# EAGLE board production (EAGLE 6.1), part 1 of 2
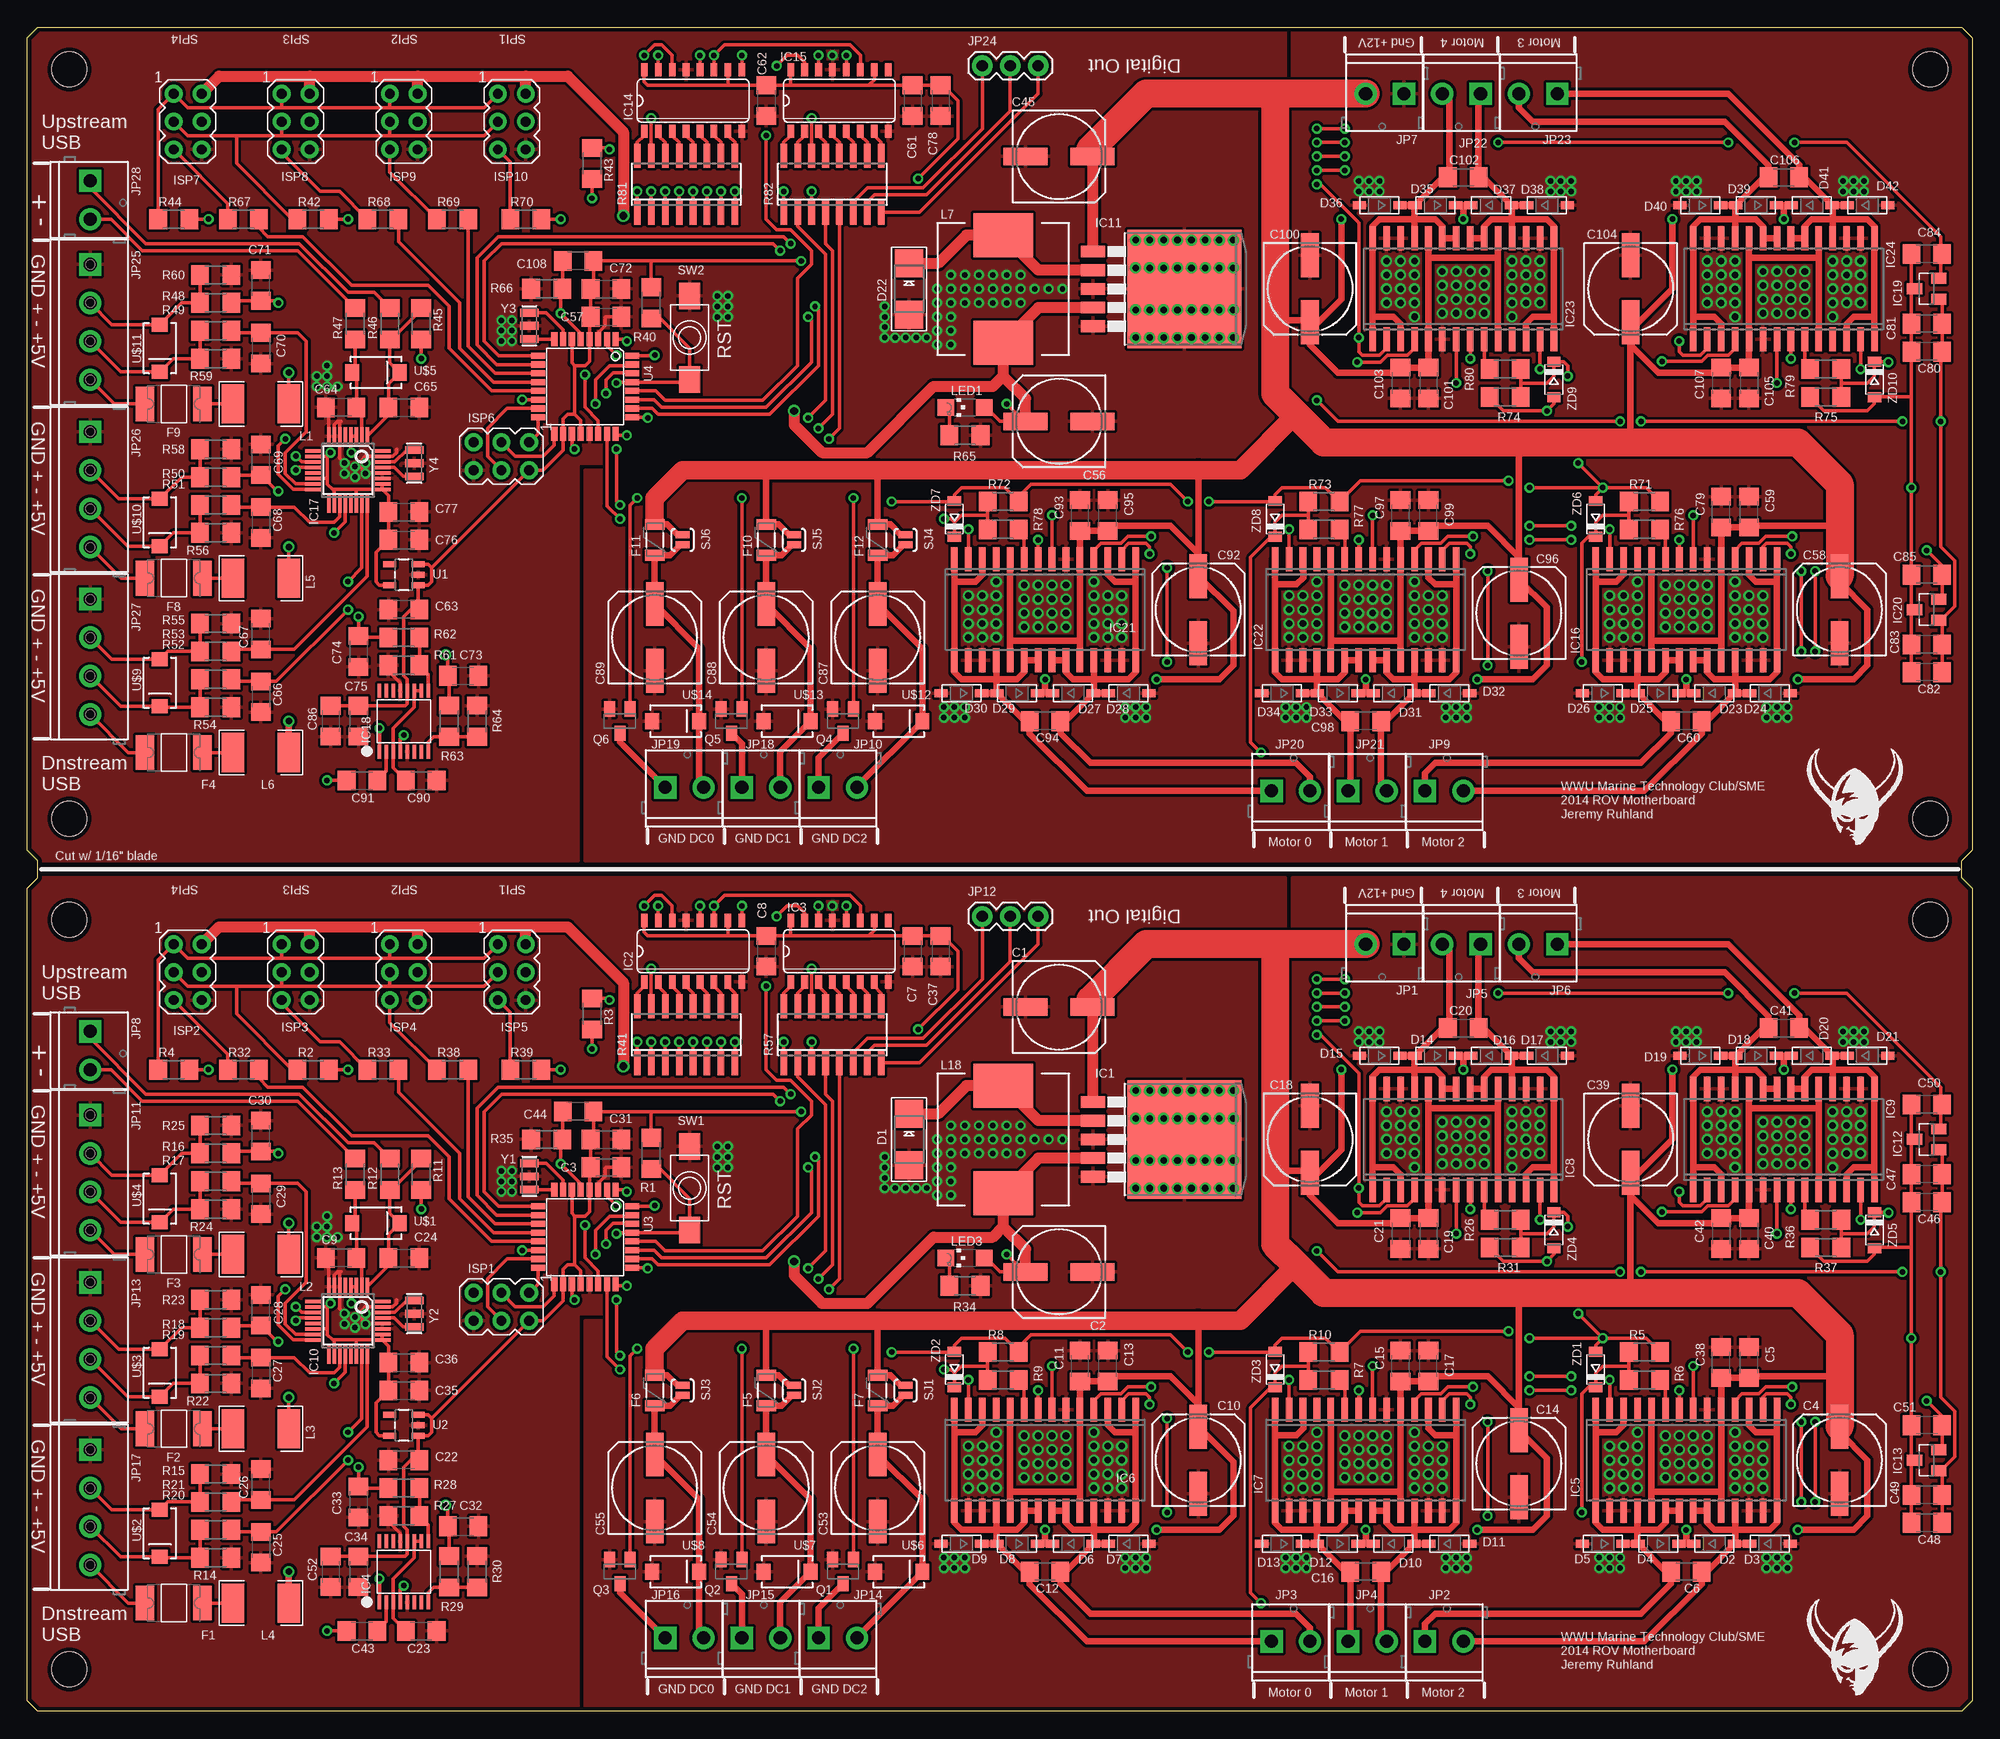
[diagram p0: board, top side]
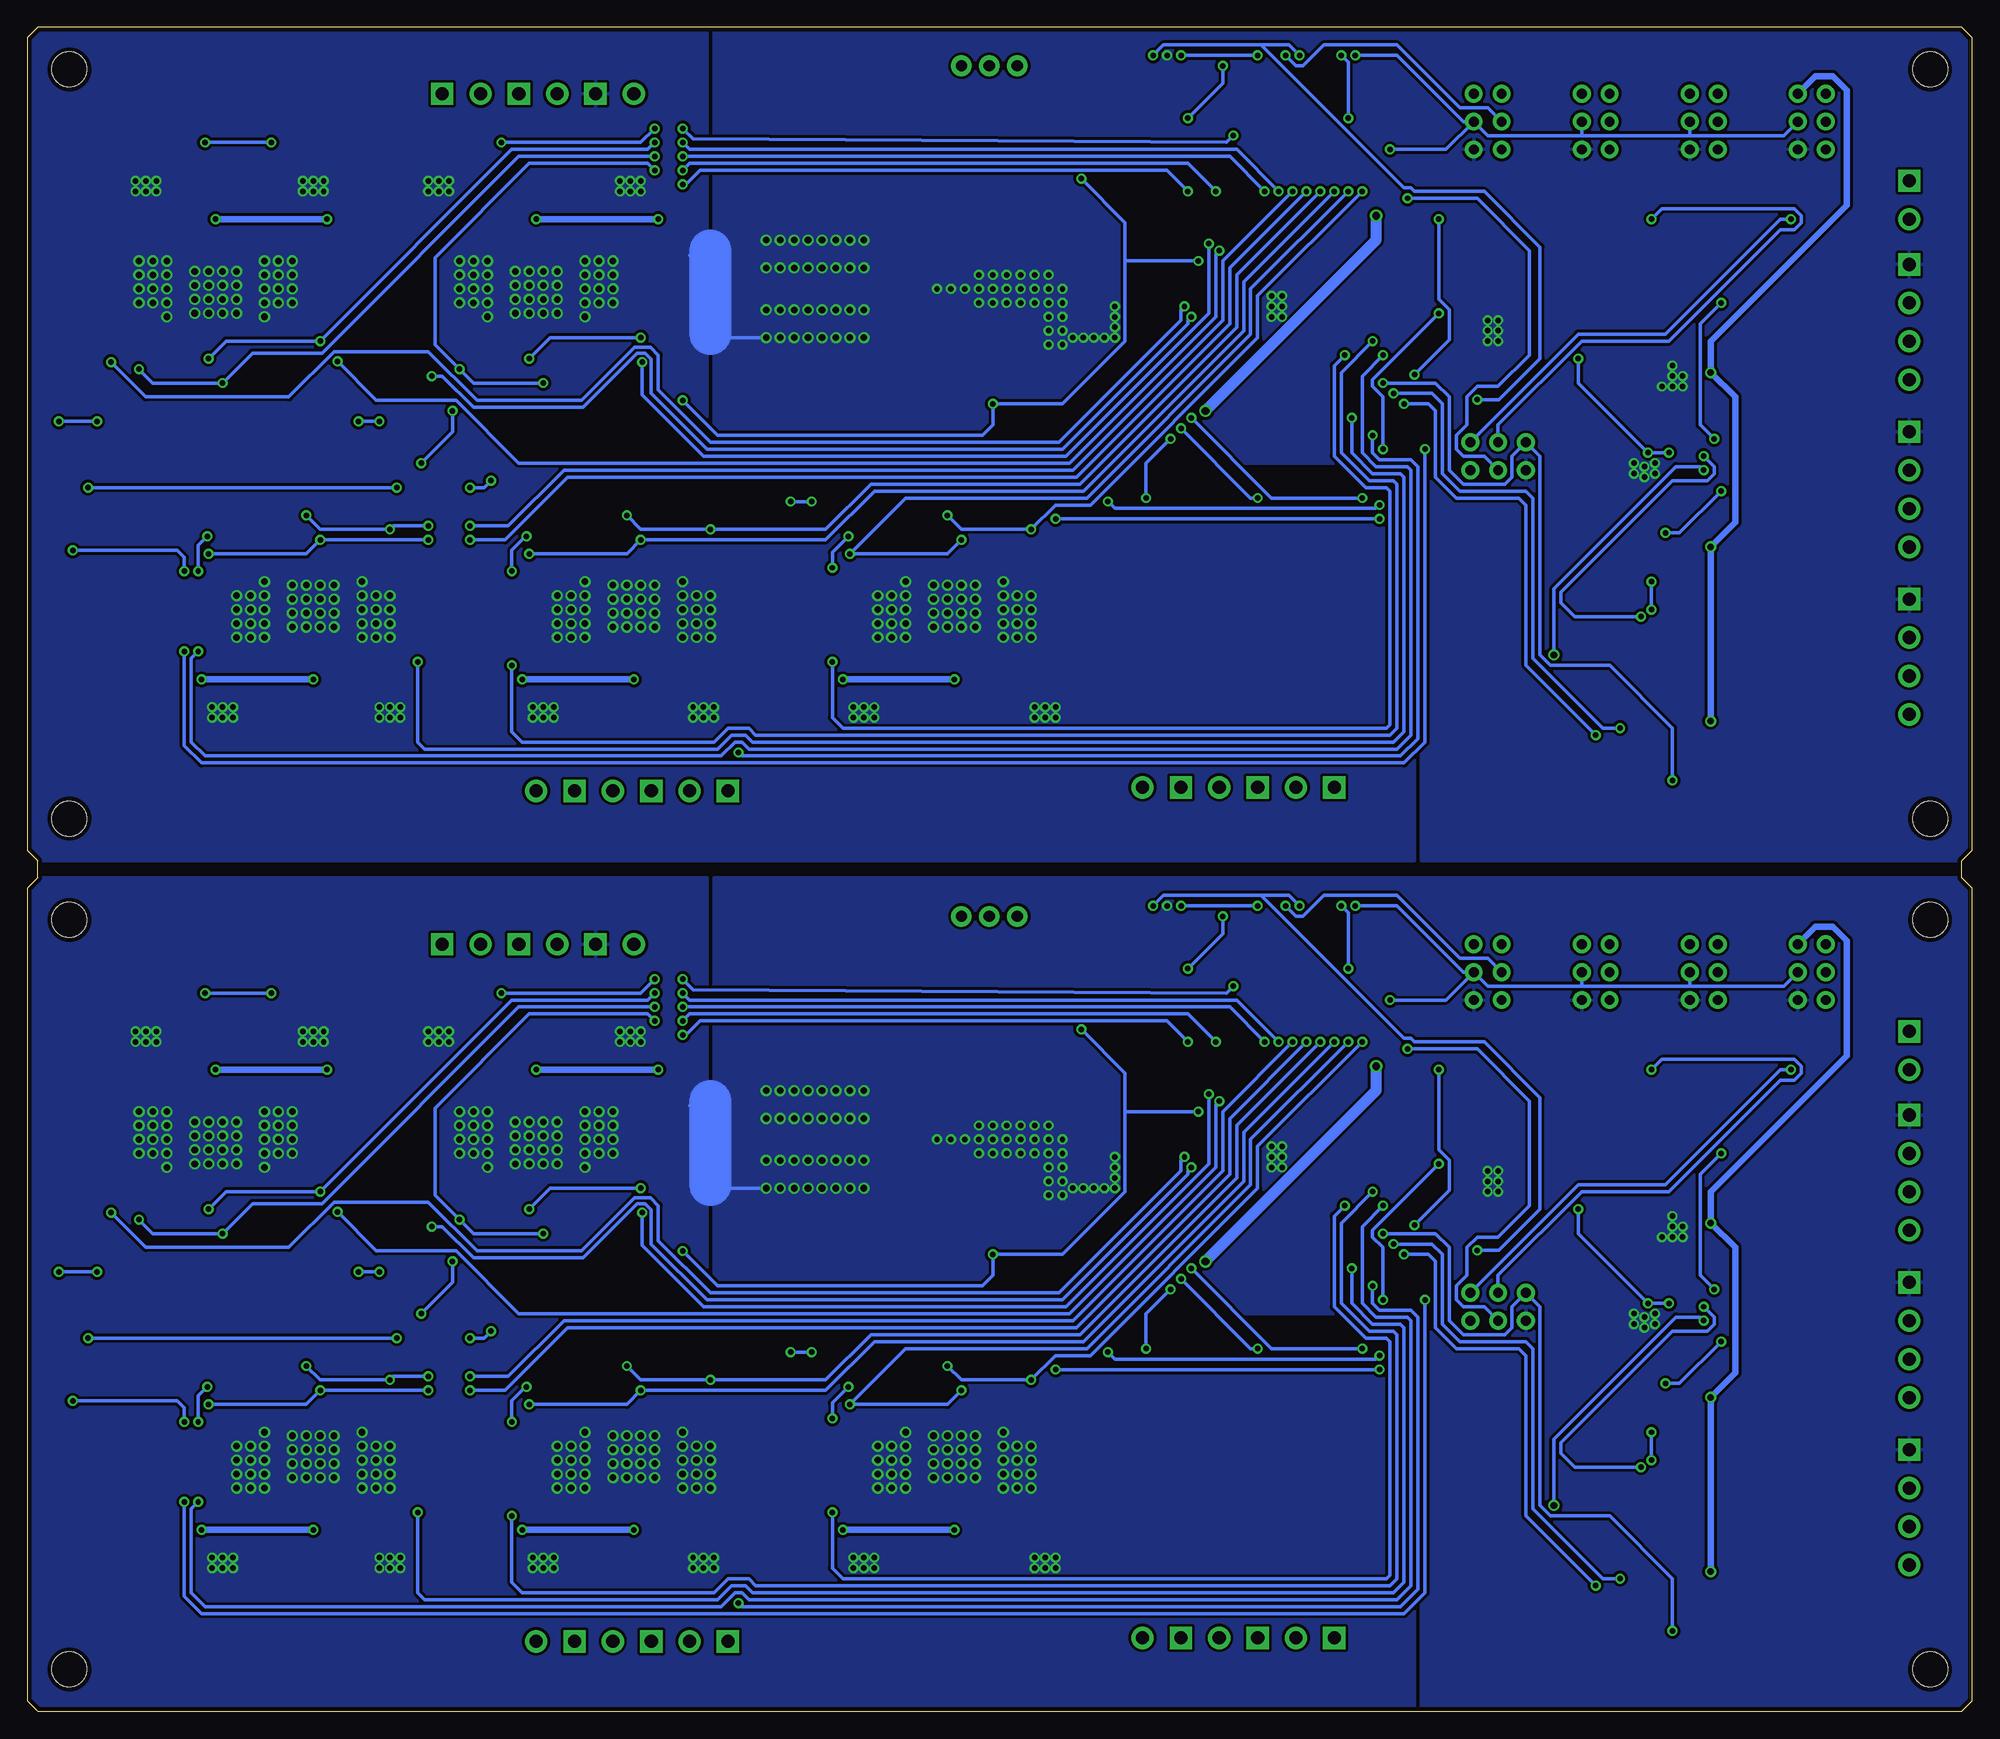
[diagram p1: board, bottom side, seen from below]

Size 177.16 x 153.35 mm. Coordinates in mm from the lower left corner, seen from the top.
Outline: 0,0.95 0,74.93 0.95,75.88 0.95,77.47 0,78.42 0,152.4 0.95,153.35 176.21,153.35 177.16,152.4 177.16,78.42 176.21,77.47 176.21,75.88 177.16,74.93 177.16,0.95 176.21,0 0.95,0 0,0.95
Copper layers (1*16): Top 0.035559375mm / dielectric 1.501140625mm / Bottom 0.035559375mm
Design rules: minimum track width 10mil, minimum drill 15mil, track to track 6mil, track to pad 6mil, pad to pad 6mil, via to via 6mil, smd to smd 6mil, copper to edge 15mil, drill to drill 8mil, minimum pad ring 10mil, minimum via ring 8mil, stop-mask expansion 4mil, vias tented up to drill 0mil, thermal gap 10mil
Holes 3.2 mm at 3.81,3.81 173.35,3.81 3.81,72.07 173.35,72.07 3.81,81.28 173.35,81.28 3.81,149.54 173.35,149.54

## Footprints (pad centres in the part's own frame; a part is rotated, then mirrored left to right if it is on the bottom)
153CLV-0807 = smd 4 x 1.6: + 3.05,0; - -3.05,0
C1206 = smd 1.6 x 1.8: 1 -1.4,0; 2 1.4,0
SMADIODE = smd 2.54 x 2.54: A 2.349,0; C -2.349,0
SOD-123 = smd 1.2 x 0.7: A 1.85,0; C -1.85,0
PTC1812L = smd 1.7 x 3.15: 1 -2.62,0; 2 2.62,0
PTC-1206 = smd 1 x 1.8: 1 -1.4,0; 2 1.4,0
TO263-5 = smd 1.067 x 2.159: 1 -3.404,-5.791; 2 -1.702,-5.791; 3 0,-5.791; 4 1.702,-5.791; 5 3.404,-5.791 | smd 10.8 x 10.41: 6 0,2.54
SO16 = smd 0.6 x 1.2: 1 -4.445,-2.8; 2 -3.175,-2.8; 3 -1.905,-2.8; 4 -0.635,-2.8; 5 0.635,-2.8; 6 1.905,-2.8; 7 3.175,-2.8; 8 4.445,-2.8; 9 4.445,2.8; 10 3.175,2.8; 11 1.905,2.8; 12 0.635,2.8; 13 -0.635,2.8; 14 -1.905,2.8; 15 -3.175,2.8; 16 -4.445,2.8
SSOP-16-FTDI = smd 0.32 x 1.26: 1 -2.223,-2.779; 2 -1.588,-2.779; 3 -0.953,-2.779; 4 -0.318,-2.779; 5 0.317,-2.779; 6 0.952,-2.779; 7 1.587,-2.779; 8 2.222,-2.779; 9 2.222,2.779; 10 1.587,2.779; 11 0.952,2.779; 12 0.317,2.779; 13 -0.318,2.779; 14 -0.953,2.779; 15 -1.588,2.779; 16 -2.223,2.779
SO-28 = smd 0.6 x 2.2: 1 -8.255,-4.6; 2 -6.985,-4.6; 3 -5.715,-4.6; 4 -4.445,-4.6; 5 -3.175,-4.6; 6 -1.905,-4.6; 7 -0.635,-4.6; 8 0.635,-4.6; 9 1.905,-4.6; 10 3.175,-4.6; 11 4.445,-4.6; 12 5.715,-4.6; 13 6.985,-4.6; 14 8.255,-4.6; 15 8.255,4.6; 16 6.985,4.6; 17 5.715,4.6; 18 4.445,4.6; 19 3.175,4.6; 20 1.905,4.6; 21 0.635,4.6; 22 -0.635,4.6; 23 -1.905,4.6; 24 -3.175,4.6; 25 -4.445,4.6; 26 -5.715,4.6; 27 -6.985,4.6; 28 -8.255,4.6
LQFP-32 = smd 0.3 x 1.6: 1 -1.75,-3.1; 2 -1.25,-3.1; 3 -0.75,-3.1; 4 -0.25,-3.1; 5 0.25,-3.1; 6 0.75,-3.1; 7 1.25,-3.1; 8 1.75,-3.1; 17 1.75,3.1; 18 1.25,3.1; 19 0.75,3.1; 20 0.25,3.1; 21 -0.25,3.1; 22 -0.75,3.1; 23 -1.25,3.1; 24 -1.75,3.1 | smd 1.6 x 0.3: 9 3.1,-1.75; 10 3.1,-1.25; 11 3.1,-0.75; 12 3.1,-0.25; 13 3.1,0.25; 14 3.1,0.75; 15 3.1,1.25; 16 3.1,1.75; 25 -3.1,1.75; 26 -3.1,1.25; 27 -3.1,0.75; 28 -3.1,0.25; 29 -3.1,-0.25; 30 -3.1,-0.75; 31 -3.1,-1.25; 32 -3.1,-1.75
SOT23 = smd 1 x 1.4: 1 -0.95,-1.1; 2 0.95,-1.1; 3 0,1.1
AVRISP = drill 0.9 pad 1.626: 1 -1.27,2.54; 2 1.27,2.54; 3 -1.27,0; 4 1.27,0; 5 -1.27,-2.54; 6 1.27,-2.54
SCREWTERMINAL-3.5MM-2 = drill 1.2 pad 2.032 square: 1 0,0 | drill 1.2 pad 2.032: 2 3.5,0
SCREWTERMINAL-3.5MM-4 = drill 1.2 pad 2.032 square: 1 0,0 | drill 1.2 pad 2.032: 2 3.5,0; 3 7,0; 4 10.5,0
1X03 = drill 1.016 pad 1.88: 1 0,0; 2 2.54,0; 3 5.08,0
INDUCTOR-1206 = smd 2.032 x 3.556: P$1 -2.54,0; P$2 2.54,0
CDRH125 = smd 5.4 x 4: 1 0,4.9; 2 0,-4.9
CHIPLED_1206 = smd 1.5 x 1.5: A 0,-1.75; C 0,1.75
R1206 = smd 1.6 x 1.803: 1 -1.422,0; 2 1.422,0
SO16' = smd 0.6 x 2.2: 1 -4.445,-2.6; 2 -3.175,-2.6; 3 -1.905,-2.6; 4 -0.635,-2.6; 5 0.635,-2.6; 6 1.905,-2.6; 7 3.175,-2.6; 8 4.445,-2.6; 9 4.445,2.6; 10 3.175,2.6; 11 1.905,2.6; 12 0.635,2.6; 13 -0.635,2.6; 14 -1.905,2.6; 15 -3.175,2.6; 16 -4.445,2.6
SJ_2S-NO = smd 0.635 x 1.27: 1 -0.45,0; 2 0.45,0
FSMSM = smd 2.413 x 1.905: A -3.81,0; B 3.81,0
SOT23-5 = smd 0.55 x 1.2: 1 -0.95,-1.3; 2 0,-1.3; 3 0.95,-1.3; 4 0.95,1.3; 5 -0.95,1.3
TQFP32-08 = smd 1.27 x 0.559: 1 -4.293,2.8; 2 -4.293,2; 3 -4.293,1.2; 4 -4.293,0.4; 5 -4.293,-0.4; 6 -4.293,-1.2; 7 -4.293,-2; 8 -4.293,-2.8; 17 4.293,-2.8; 18 4.293,-2; 19 4.293,-1.2; 20 4.293,-0.4; 21 4.293,0.4; 22 4.293,1.2; 23 4.293,2; 24 4.293,2.8 | smd 0.559 x 1.27: 9 -2.8,-4.293; 10 -2,-4.293; 11 -1.2,-4.293; 12 -0.4,-4.293; 13 0.4,-4.293; 14 1.2,-4.293; 15 2,-4.293; 16 2.8,-4.293; 25 2.8,4.293; 26 2,4.293; 27 1.2,4.293; 28 0.4,4.293; 29 -0.4,4.293; 30 -1.2,4.293; 31 -2,4.293; 32 -2.8,4.293
SMA-DIODE = smd 1.27 x 1.47: A -2.15,0; C 2.15,0
RESONATOR-SMD = smd 0.7 x 1.7: 1 -1.2,0; 2 0,0; 3 1.2,0
SOD-123' = smd 0.91 x 1.22: A 1.635,0; C -1.635,0

## Placement (x,y rotation side)
C1  1000uF  [153CLV-0807]  93.98,64.14 0 top
C2  1000uF  [153CLV-0807]  93.98,40.01 180 top
C3  0.1uF  [C1206]  52.7,49.53 0 top
C4  500uF  [153CLV-0807]  165.1,22.86 90 top
C5  0.1uF  [C1206]  156.84,31.75 90 top
C6  1uF  [C1206]  151.13,12.7 180 top
C7  0.1uF  [C1206]  80.64,69.22 270 top
C8  0.1uF  [C1206]  67.31,69.22 270 top
C9  47pF  [C1206]  28.57,41.27 180 top
C10  500uF  [153CLV-0807]  106.68,22.86 90 top
C11  0.1uF  [C1206]  95.89,31.43 90 top
C12  1uF  [C1206]  92.71,12.7 180 top
C13  4.7uF  [C1206]  98.42,31.43 90 top
C14  500uF  [153CLV-0807]  135.89,22.54 90 top
C15  0.1uF  [C1206]  125.09,31.43 90 top
C16  1uF  [C1206]  121.92,12.7 180 top
C17  4.7uF  [C1206]  127.64,31.43 90 top
C18  500uF  [153CLV-0807]  116.84,52.07 270 top
C19  0.1uF  [C1206]  127.64,43.5 270 top
C20  1uF  [C1206]  130.81,62.23 0 top
C21  4.7uF  [C1206]  125.09,43.5 270 top
C22  4.7uF  [C1206]  34.29,22.86 180 top
C23  0.1uF  [C1206]  35.88,7.3 0 top
C24  47pF  [C1206]  34.29,41.27 0 top
C25  47pF  [C1206]  21.27,14.92 270 top
C26  47pF  [C1206]  21.27,20.64 90 top
C27  47pF  [C1206]  21.27,30.8 270 top
C28  47pF  [C1206]  21.27,36.51 90 top
C29  47pF  [C1206]  21.27,46.67 270 top
C30  47pF  [C1206]  21.27,52.39 90 top
C31  4.7uF  [C1206]  52.7,52.07 0 top
C32  47pF  [C1206]  39.69,16.83 0 top
C33  47pF  [C1206]  30.16,19.05 270 top
C34  0.1uF  [C1206]  30.16,12.7 270 top
C35  4.7uF  [C1206]  34.29,29.21 0 top
C36  0.1uF  [C1206]  34.29,31.75 0 top
C37  4.7uF  [C1206]  83.19,69.22 270 top
C38  4.7uF  [C1206]  154.31,31.75 90 top
C39  500uF  [153CLV-0807]  146.05,52.07 270 top
C40  0.1uF  [C1206]  156.84,43.5 270 top
C41  1uF  [C1206]  160.02,62.23 0 top
C42  4.7uF  [C1206]  154.31,43.5 270 top
C43  0.1uF  [C1206]  30.48,7.3 0 top
C44  0.1uF  [C1206]  50.16,54.61 180 top
C45  1000uF  [153CLV-0807]  93.98,141.6 0 top
C46  4.7uF  [C1206]  173.04,46.35 180 top
C47  0.1uF  [C1206]  173.04,48.9 180 top
C48  4.7uF  [C1206]  173.04,17.14 180 top
C49  0.1uF  [C1206]  173.04,19.68 180 top
C50  0.1uF  [C1206]  173.04,55.24 180 top
C51  0.1uF  [C1206]  173.04,26.04 180 top
C52  4.7uF  [C1206]  27.62,12.7 270 top
C53  1000uF  [153CLV-0807]  77.47,20.32 90 top
C54  1000uF  [153CLV-0807]  67.31,20.32 90 top
C55  1000uF  [153CLV-0807]  57.15,20.32 90 top
C56  1000uF  [153CLV-0807]  93.98,117.47 180 top
C57  0.1uF  [C1206]  52.7,127 0 top
C58  500uF  [153CLV-0807]  165.1,100.33 90 top
C59  0.1uF  [C1206]  156.84,109.22 90 top
C60  1uF  [C1206]  151.13,90.17 180 top
C61  0.1uF  [C1206]  80.64,146.69 270 top
C62  0.1uF  [C1206]  67.31,146.69 270 top
C63  4.7uF  [C1206]  34.29,100.33 180 top
C64  47pF  [C1206]  28.57,118.75 180 top
C65  47pF  [C1206]  34.29,118.75 0 top
C66  47pF  [C1206]  21.27,92.39 270 top
C67  47pF  [C1206]  21.27,98.11 90 top
C68  47pF  [C1206]  21.27,108.27 270 top
C69  47pF  [C1206]  21.27,113.98 90 top
C70  47pF  [C1206]  21.27,124.14 270 top
C71  47pF  [C1206]  21.27,129.86 90 top
C72  4.7uF  [C1206]  52.7,129.54 0 top
C73  47pF  [C1206]  39.69,94.3 0 top
C74  47pF  [C1206]  30.16,96.52 270 top
C75  0.1uF  [C1206]  30.16,90.17 270 top
C76  4.7uF  [C1206]  34.29,106.68 0 top
C77  0.1uF  [C1206]  34.29,109.22 0 top
C78  4.7uF  [C1206]  83.19,146.69 270 top
C79  4.7uF  [C1206]  154.31,109.22 90 top
C80  4.7uF  [C1206]  173.04,123.83 180 top
C81  0.1uF  [C1206]  173.04,126.36 180 top
C82  4.7uF  [C1206]  173.04,94.61 180 top
C83  0.1uF  [C1206]  173.04,97.16 180 top
C84  0.1uF  [C1206]  173.04,132.72 180 top
C85  0.1uF  [C1206]  173.04,103.5 180 top
C86  4.7uF  [C1206]  27.62,90.17 270 top
C87  1000uF  [153CLV-0807]  77.47,97.79 90 top
C88  1000uF  [153CLV-0807]  67.31,97.79 90 top
C89  1000uF  [153CLV-0807]  57.15,97.79 90 top
C90  0.1uF  [C1206]  35.88,84.77 0 top
C91  0.1uF  [C1206]  30.48,84.77 0 top
C92  500uF  [153CLV-0807]  106.68,100.33 90 top
C93  0.1uF  [C1206]  95.89,108.9 90 top
C94  1uF  [C1206]  92.71,90.17 180 top
C95  4.7uF  [C1206]  98.42,108.9 90 top
C96  500uF  [153CLV-0807]  135.89,100.01 90 top
C97  0.1uF  [C1206]  125.09,108.9 90 top
C98  1uF  [C1206]  121.92,90.17 180 top
C99  4.7uF  [C1206]  127.64,108.9 90 top
C100  500uF  [153CLV-0807]  116.84,129.54 270 top
C101  0.1uF  [C1206]  127.64,120.97 270 top
C102  1uF  [C1206]  130.81,139.7 0 top
C103  4.7uF  [C1206]  125.09,120.97 270 top
C104  500uF  [153CLV-0807]  146.05,129.54 270 top
C105  0.1uF  [C1206]  156.84,120.97 270 top
C106  1uF  [C1206]  160.02,139.7 0 top
C107  4.7uF  [C1206]  154.31,120.97 270 top
C108  0.1uF  [C1206]  50.16,132.08 180 top
D1  [SMADIODE]  80.33,52.07 270 top
D2  [SOD-123]  153.67,15.24 0 top
D3  [SOD-123]  158.75,15.24 0 top
D4  [SOD-123]  148.59,15.24 180 top
D5  [SOD-123]  143.51,15.24 180 top
D6  [SOD-123]  95.25,15.24 0 top
D7  [SOD-123]  100.33,15.24 0 top
D8  [SOD-123]  90.17,15.24 180 top
D9  [SOD-123]  85.09,15.24 180 top
D10  [SOD-123]  124.46,15.24 0 top
D11  [SOD-123]  129.54,15.24 0 top
D12  [SOD-123]  119.38,15.24 180 top
D13  [SOD-123]  114.3,15.24 180 top
D14  [SOD-123]  128.27,59.69 180 top
D15  [SOD-123]  123.19,59.69 180 top
D16  [SOD-123]  133.35,59.69 0 top
D17  [SOD-123]  138.43,59.69 0 top
D18  [SOD-123]  157.48,59.69 180 top
D19  [SOD-123]  152.4,59.69 180 top
D20  [SOD-123]  162.56,59.69 0 top
D21  [SOD-123]  167.64,59.69 0 top
D22  [SMADIODE]  80.33,129.54 270 top
D23  [SOD-123]  153.67,92.71 0 top
D24  [SOD-123]  158.75,92.71 0 top
D25  [SOD-123]  148.59,92.71 180 top
D26  [SOD-123]  143.51,92.71 180 top
D27  [SOD-123]  95.25,92.71 0 top
D28  [SOD-123]  100.33,92.71 0 top
D29  [SOD-123]  90.17,92.71 180 top
D30  [SOD-123]  85.09,92.71 180 top
D31  [SOD-123]  124.46,92.71 0 top
D32  [SOD-123]  129.54,92.71 0 top
D33  [SOD-123]  119.38,92.71 180 top
D34  [SOD-123]  114.3,92.71 180 top
D35  [SOD-123]  128.27,137.16 180 top
D36  [SOD-123]  123.19,137.16 180 top
D37  [SOD-123]  133.35,137.16 0 top
D38  [SOD-123]  138.43,137.16 0 top
D39  [SOD-123]  157.48,137.16 180 top
D40  [SOD-123]  152.4,137.16 180 top
D41  [SOD-123]  162.56,137.16 0 top
D42  [SOD-123]  167.64,137.16 0 top
F1  500mA  [PTC1812L]  13.34,9.84 180 top
F2  500mA  [PTC1812L]  13.34,25.72 180 top
F3  500mA  [PTC1812L]  13.34,41.59 180 top
F4  500mA  [PTC1812L]  13.34,87.31 180 top
F5  PTCSMD  [PTC-1206]  67.31,29.21 90 top
F6  PTCSMD  [PTC-1206]  57.15,29.21 90 top
F7  PTCSMD  [PTC-1206]  77.47,29.21 90 top
F8  500mA  [PTC1812L]  13.34,103.19 180 top
F9  500mA  [PTC1812L]  13.34,119.06 180 top
F10  PTCSMD  [PTC-1206]  67.31,106.68 90 top
F11  PTCSMD  [PTC-1206]  57.15,106.68 90 top
F12  PTCSMD  [PTC-1206]  77.47,106.68 90 top
IC1  LM2576  [TO263-5]  102.87,52.07 270 top
IC2  74LS595D  [SO16]  60.64,69.22 0 top
IC3  74LS595D  [SO16]  73.98,69.22 0 top
IC4  IC_FT230X-SSOP-16  [SSOP-16-FTDI]  34.29,12.7 0 top
IC5  VN5772AK  [SO-28]  151.13,22.86 180 top
IC6  VN5772AK  [SO-28]  92.71,22.86 180 top
IC7  VN5772AK  [SO-28]  121.92,22.86 180 top
IC8  VN5772AK  [SO-28]  130.81,52.07 0 top
IC9  VN5772AK  [SO-28]  160.02,52.07 0 top
IC10  TUSB2046B  [LQFP-32]  29.21,35.56 180 top
IC11  LM2576  [TO263-5]  102.87,129.54 270 top
IC12  LM50  [SOT23]  173.04,52.07 90 top
IC13  LM50  [SOT23]  173.04,22.86 90 top
IC14  74LS595D  [SO16]  60.64,146.69 0 top
IC15  74LS595D  [SO16]  73.98,146.69 0 top
IC16  VN5772AK  [SO-28]  151.13,100.33 180 top
IC17  TUSB2046B  [LQFP-32]  29.21,113.03 180 top
IC18  IC_FT230X-SSOP-16  [SSOP-16-FTDI]  34.29,90.17 0 top
IC19  LM50  [SOT23]  173.04,129.54 90 top
IC20  LM50  [SOT23]  173.04,100.33 90 top
IC21  VN5772AK  [SO-28]  92.71,100.33 180 top
IC22  VN5772AK  [SO-28]  121.92,100.33 180 top
IC23  VN5772AK  [SO-28]  130.81,129.54 0 top
IC24  VN5772AK  [SO-28]  160.02,129.54 0 top
ISP1  AVRISP-6  [AVRISP]  43.18,36.83 270 top
ISP2  AVRISP-6  [AVRISP]  14.61,67.31 0 top
ISP3  AVRISP-6  [AVRISP]  24.45,67.31 0 top
ISP4  AVRISP-6  [AVRISP]  34.29,67.31 0 top
ISP5  AVRISP-6  [AVRISP]  44.13,67.31 0 top
ISP6  AVRISP-6  [AVRISP]  43.18,114.3 270 top
ISP7  AVRISP-6  [AVRISP]  14.61,144.78 0 top
ISP8  AVRISP-6  [AVRISP]  24.45,144.78 0 top
ISP9  AVRISP-6  [AVRISP]  34.29,144.78 0 top
ISP10  AVRISP-6  [AVRISP]  44.13,144.78 0 top
JP1  [SCREWTERMINAL-3.5MM-2]  125.41,69.85 180 top
JP2  [SCREWTERMINAL-3.5MM-2]  127.32,6.35 0 top
JP3  [SCREWTERMINAL-3.5MM-2]  113.35,6.35 0 top
JP4  [SCREWTERMINAL-3.5MM-2]  120.33,6.35 0 top
JP5  [SCREWTERMINAL-3.5MM-2]  132.4,69.85 180 top
JP6  [SCREWTERMINAL-3.5MM-2]  139.38,69.85 180 top
JP7  [SCREWTERMINAL-3.5MM-2]  125.41,147.32 180 top
JP8  [SCREWTERMINAL-3.5MM-2]  5.71,61.91 270 top
JP9  [SCREWTERMINAL-3.5MM-2]  127.32,83.82 0 top
JP10  [SCREWTERMINAL-3.5MM-2]  72.07,84.14 0 top
JP11  [SCREWTERMINAL-3.5MM-4]  5.71,54.29 270 top
JP12  [1X03]  87,72.39 0 top
JP13  [SCREWTERMINAL-3.5MM-4]  5.71,39.05 270 top
JP14  [SCREWTERMINAL-3.5MM-2]  72.07,6.67 0 top
JP15  [SCREWTERMINAL-3.5MM-2]  65.09,6.67 0 top
JP16  [SCREWTERMINAL-3.5MM-2]  58.1,6.67 0 top
JP17  [SCREWTERMINAL-3.5MM-4]  5.71,23.81 270 top
JP18  [SCREWTERMINAL-3.5MM-2]  65.09,84.14 0 top
JP19  [SCREWTERMINAL-3.5MM-2]  58.1,84.14 0 top
JP20  [SCREWTERMINAL-3.5MM-2]  113.35,83.82 0 top
JP21  [SCREWTERMINAL-3.5MM-2]  120.33,83.82 0 top
JP22  [SCREWTERMINAL-3.5MM-2]  132.4,147.32 180 top
JP23  [SCREWTERMINAL-3.5MM-2]  139.38,147.32 180 top
JP24  [1X03]  87,149.86 0 top
JP25  [SCREWTERMINAL-3.5MM-4]  5.71,131.76 270 top
JP26  [SCREWTERMINAL-3.5MM-4]  5.71,116.52 270 top
JP27  [SCREWTERMINAL-3.5MM-4]  5.71,101.28 270 top
JP28  [SCREWTERMINAL-3.5MM-2]  5.71,139.38 270 top
L1  [INDUCTOR-1206]  21.27,119.06 180 top
L2  [INDUCTOR-1206]  21.27,41.59 180 top
L3  [INDUCTOR-1206]  21.27,25.72 180 top
L4  [INDUCTOR-1206]  21.27,9.84 180 top
L5  [INDUCTOR-1206]  21.27,103.19 180 top
L6  [INDUCTOR-1206]  21.27,87.31 180 top
L7  100uH  [CDRH125]  88.9,129.54 0 top
L18  100uH  [CDRH125]  88.9,52.07 0 top
LED1  [CHIPLED_1206]  85.41,118.75 90 top
LED3  [CHIPLED_1206]  85.41,41.27 90 top
Q1  [SOT23]  74.3,12.7 180 top
Q2  [SOT23]  64.14,12.7 180 top
Q3  [SOT23]  53.98,12.7 180 top
Q4  [SOT23]  74.3,90.17 180 top
Q5  [SOT23]  64.14,90.17 180 top
Q6  [SOT23]  53.98,90.17 180 top
R1  10k  [R1206]  56.83,50.8 90 top
R2  10k  [R1206]  26.04,58.42 0 top
R3  10k  [R1206]  51.44,63.5 270 top
R4  10k  [R1206]  13.34,58.42 0 top
R5  2k  [R1206]  147.32,32.7 0 top
R6  70  [R1206]  147.32,30.16 0 top
R7  70  [R1206]  118.11,30.16 0 top
R8  2k  [R1206]  88.9,32.7 0 top
R9  70  [R1206]  88.9,30.16 0 top
R10  2k  [R1206]  118.11,32.7 0 top
R11  1.5k  [R1206]  35.88,48.9 270 top
R12  27  [R1206]  33.02,48.9 90 top
R13  27  [R1206]  29.84,48.9 90 top
R14  15k  [R1206]  17.14,13.97 0 top
R15  15k  [R1206]  17.14,21.59 0 top
R16  27  [R1206]  17.14,50.8 0 top
R17  27  [R1206]  17.14,48.26 0 top
R18  27  [R1206]  17.14,34.92 0 top
R19  27  [R1206]  17.14,32.38 0 top
R20  27  [R1206]  17.14,16.51 0 top
R21  27  [R1206]  17.14,19.05 0 top
R22  15k  [R1206]  17.14,29.84 0 top
R23  15k  [R1206]  17.14,37.47 0 top
R24  15k  [R1206]  17.14,45.72 0 top
R25  15k  [R1206]  17.14,53.34 0 top
R26  70  [R1206]  134.62,44.77 180 top
R27  15k  [R1206]  34.29,17.78 0 top
R28  27  [R1206]  34.29,20.32 0 top
R29  27  [R1206]  38.42,12.7 270 top
R30  15k  [R1206]  40.96,12.7 270 top
R31  2k  [R1206]  134.62,42.23 180 top
R32  10k  [R1206]  19.68,58.42 0 top
R33  10k  [R1206]  32.38,58.42 0 top
R34  500  [R1206]  85.41,38.73 0 top
R35  0  [R1206]  47.31,52.07 180 top
R36  70  [R1206]  163.83,44.77 180 top
R37  2k  [R1206]  163.83,42.23 180 top
R38  10k  [R1206]  38.73,58.42 0 top
R39  10k  [R1206]  45.4,58.42 0 top
R40  10k  [R1206]  56.83,128.27 90 top
R41  10k  [SO16']  60.01,61.59 0 top
R42  10k  [R1206]  26.04,135.89 0 top
R43  10k  [R1206]  51.44,140.97 270 top
R44  10k  [R1206]  13.34,135.89 0 top
R45  1.5k  [R1206]  35.88,126.36 270 top
R46  27  [R1206]  33.02,126.36 90 top
R47  27  [R1206]  29.84,126.36 90 top
R48  27  [R1206]  17.14,128.27 0 top
R49  27  [R1206]  17.14,125.73 0 top
R50  27  [R1206]  17.14,112.39 0 top
R51  27  [R1206]  17.14,109.86 0 top
R52  27  [R1206]  17.14,93.98 0 top
R53  27  [R1206]  17.14,96.52 0 top
R54  15k  [R1206]  17.14,91.44 0 top
R55  15k  [R1206]  17.14,99.06 0 top
R56  15k  [R1206]  17.14,107.31 0 top
R57  10k  [SO16']  73.34,61.59 0 top
R58  15k  [R1206]  17.14,114.94 0 top
R59  15k  [R1206]  17.14,123.19 0 top
R60  15k  [R1206]  17.14,130.81 0 top
R61  15k  [R1206]  34.29,95.25 0 top
R62  27  [R1206]  34.29,97.79 0 top
R63  27  [R1206]  38.42,90.17 270 top
R64  15k  [R1206]  40.96,90.17 270 top
R65  500  [R1206]  85.41,116.2 0 top
R66  0  [R1206]  47.31,129.54 180 top
R67  10k  [R1206]  19.68,135.89 0 top
R68  10k  [R1206]  32.38,135.89 0 top
R69  10k  [R1206]  38.73,135.89 0 top
R70  10k  [R1206]  45.4,135.89 0 top
R71  2k  [R1206]  147.32,110.17 0 top
R72  2k  [R1206]  88.9,110.17 0 top
R73  2k  [R1206]  118.11,110.17 0 top
R74  2k  [R1206]  134.62,119.7 180 top
R75  2k  [R1206]  163.83,119.7 180 top
R76  70  [R1206]  147.32,107.63 0 top
R77  70  [R1206]  118.11,107.63 0 top
R78  70  [R1206]  88.9,107.63 0 top
R79  70  [R1206]  163.83,122.24 180 top
R80  70  [R1206]  134.62,122.24 180 top
R81  10k  [SO16']  60.01,139.06 0 top
R82  10k  [SO16']  73.34,139.06 0 top
SJ1  JMP  [SJ_2S-NO]  80.01,29.21 90 top
SJ2  JMP  [SJ_2S-NO]  69.85,29.21 90 top
SJ3  JMP  [SJ_2S-NO]  59.69,29.21 90 top
SJ4  JMP  [SJ_2S-NO]  80.01,106.68 90 top
SJ5  JMP  [SJ_2S-NO]  69.85,106.68 90 top
SJ6  JMP  [SJ_2S-NO]  59.69,106.68 90 top
SW1  [FSMSM]  60.33,47.62 270 top
SW2  [FSMSM]  60.33,125.09 270 top
U1  NCP4625  [SOT23-5]  34.29,103.5 90 top
U2  NCP4625  [SOT23-5]  34.29,26.04 90 top
U3  ATMEGA168  [TQFP32-08]  50.8,43.18 270 top
U4  ATMEGA168  [TQFP32-08]  50.8,120.65 270 top
U$1  TVS  [SMA-DIODE]  31.75,44.45 0 top
U$2  TVS  [SMA-DIODE]  12.06,16.19 270 top
U$3  TVS  [SMA-DIODE]  12.06,30.8 270 top
U$4  TVS  [SMA-DIODE]  12.06,46.67 270 top
U$5  TVS  [SMA-DIODE]  31.75,121.92 0 top
U$6  TVS  [SMA-DIODE]  79.38,12.7 0 top
U$7  TVS  [SMA-DIODE]  69.22,12.7 0 top
U$8  TVS  [SMA-DIODE]  59.05,12.7 0 top
U$9  TVS  [SMA-DIODE]  12.06,93.66 270 top
U$10  TVS  [SMA-DIODE]  12.06,108.27 270 top
U$11  TVS  [SMA-DIODE]  12.06,124.14 270 top
U$12  TVS  [SMA-DIODE]  79.38,90.17 0 top
U$13  TVS  [SMA-DIODE]  69.22,90.17 0 top
U$14  TVS  [SMA-DIODE]  59.05,90.17 0 top
Y1  16Mhz  [RESONATOR-SMD]  45.72,48.7 270 top
Y2  6MHz  [RESONATOR-SMD]  35.24,36.2 90 top
Y3  16Mhz  [RESONATOR-SMD]  45.72,126.17 270 top
Y4  6MHz  [RESONATOR-SMD]  35.24,113.67 90 top
ZD1  5V  [SOD-123']  142.88,31.11 90 top
ZD2  5V  [SOD-123']  84.45,31.11 90 top
ZD3  5V  [SOD-123']  113.67,31.11 90 top
ZD4  5V  [SOD-123']  139.06,43.81 270 top
ZD5  5V  [SOD-123']  168.28,43.81 270 top
ZD6  5V  [SOD-123']  142.88,108.58 90 top
ZD7  5V  [SOD-123']  84.45,108.58 90 top
ZD8  5V  [SOD-123']  113.67,108.58 90 top
ZD9  5V  [SOD-123']  139.06,121.28 270 top
ZD10  5V  [SOD-123']  168.28,121.28 270 top

## Library data of the parts
C1-C108 D1-D42 ISP1-ISP10 LED1 LED3 Q1-Q6 R1-R40 R42-R56 R58-R80 = adafruit
F1-F4 F8 F9 IC4 IC18 ZD1-ZD10 = dp_devices
F5-F7 F10-F12 IC2 IC3 IC14 IC15 JP1-JP28 L1-L7 L18 SJ1-SJ6 U1-U4 U$1-U$14 Y1-Y4 = sparkfun
IC1 IC11-IC13 IC19 IC20 = linear
IC5-IC10 IC16 IC17 IC21-IC24 = rov_club
R41 R57 R81 R82 = resistor-bourns; OC_FARNELL: unknown; OC_NEWARK: unknown
SW1 SW2 = alcoswitch

## Nets
0HA: IC6.2 IC6.8 R41.2
0HA1: IC21.2 IC21.8 R81.2
0HB: IC6.7 IC6.13 R41.1
0HB1: IC21.7 IC21.13 R81.1
0SENSE: R8.1 R9.1 U3.23 ZD2.C
0SENSE1: R72.1 R78.1 U4.23 ZD7.C
0STAT: IC6.4 U3.32
0STAT1: IC21.4 U4.32
1HA: IC7.2 IC7.8 R41.3
1HA1: IC22.2 IC22.8 R81.3
1HB: IC7.7 IC7.13 R41.4
1HB1: IC22.7 IC22.13 R81.4
1SENSE: R7.1 R10.1 U3.24 ZD3.C
1SENSE1: R73.1 R77.1 U4.24 ZD8.C
1STAT: IC7.4 U3.1
1STAT1: IC22.4 U4.1
2HA: IC5.2 IC5.8 R41.5
2HA1: IC16.2 IC16.8 R81.5
2HB: IC5.7 IC5.13 R41.6
2HB1: IC16.7 IC16.13 R81.6
2SENSE: R5.1 R6.1 U3.25 ZD1.C
2SENSE1: R71.1 R76.1 U4.25 ZD6.C
2STAT: IC5.4 U3.2
2STAT1: IC16.4 U4.2
3.3V: C35.1 C36.1 IC10.3 IC10.4 IC10.10 IC10.14 IC10.18 IC10.22 IC10.25 IC10.26 R11.2 U2.5
3.3V1: C76.1 C77.1 IC17.3 IC17.4 IC17.10 IC17.14 IC17.18 IC17.22 IC17.25 IC17.26 R45.2 U1.5
3HA: IC9.2 IC9.8 R41.7
3HA1: IC24.2 IC24.8 R81.7
3HB: IC9.7 IC9.13 R41.8
3HB1: IC24.7 IC24.13 R81.8
3SENSE: R36.1 R37.1 U3.26 ZD5.C
3SENSE1: R75.1 R79.1 U4.26 ZD10.C
3STAT: IC9.4 U3.9
3STAT1: IC24.4 U4.9
4HA: IC8.2 IC8.8 R57.3
4HA1: IC23.2 IC23.8 R82.3
4HB: IC8.7 IC8.13 R57.1
4HB1: IC23.7 IC23.13 R82.1
4SENSE: R26.1 R31.1 U3.27 ZD4.C
4SENSE1: R74.1 R80.1 U4.27 ZD9.C
4STAT: IC8.4 U3.10
4STAT1: IC23.4 U4.10
!EN1: R39.2 U3.22
!EN2: R38.2 U3.11
!EN3: R33.2 U3.12
!EN4: R32.2 U3.13
!EN5: R67.2 U4.13
!EN6: R68.2 U4.12
!EN7: R70.2 U4.22
!EN8: R69.2 U4.11
!RST: C43.1 ISP1.5 R1.1 SW1.B U3.29
!RST1: C91.1 ISP6.5 R40.1 SW2.B U4.29
+5V: C2.+ C3.1 C7.1 C8.1 C22.1 C31.1 C34.1 C37.1 C44.1 C46.1 C47.1 C48.1 C49.1 C52.1 IC1.4 IC2.10 IC2.16 IC3.10 IC3.16 IC4.12 IC12.1 IC13.1 ISP1.2 ISP2.2 ISP3.2 ISP4.2 ISP5.2 L2.P$1 L3.P$1 L4.P$1 L18.2 LED3.A R1.2 U2.1 U2.3 U3.4 U3.6 U3.18 U3.20
+5V1: C56.+ C57.1 C61.1 C62.1 C63.1 C72.1 C75.1 C78.1 C80.1 C81.1 C82.1 C83.1 C86.1 C108.1 IC11.4 IC14.10 IC14.16 IC15.10 IC15.16 IC18.12 IC19.1 IC20.1 ISP6.2 ISP7.2 ISP8.2 ISP9.2 ISP10.2 L1.P$1 L5.P$1 L6.P$1 L7.2 LED1.A R40.2 U1.1 U1.3 U4.4 U4.6 U4.18 U4.20
+12V: C1.+ C4.+ C5.1 C10.+ C11.1 C13.1 C14.+ C15.1 C17.1 C18.+ C19.1 C21.1 C38.1 C39.+ C40.1 C42.1 D2.C D4.C D6.C D8.C D10.C D12.C D14.C D16.C D18.C D20.C F5.2 F6.2 F7.2 IC1.1 IC5.5 IC5.10 IC5.19 IC5.24 IC6.5 IC6.10 IC6.19 IC6.24 IC7.5 IC7.10 IC7.19 IC7.24 IC8.5 IC8.10 IC8.19 IC8.24 IC9.5 IC9.10 IC9.19 IC9.24 JP1.2 SJ1.2 SJ2.2 SJ3.2
+12V1: C45.+ C58.+ C59.1 C79.1 C92.+ C93.1 C95.1 C96.+ C97.1 C99.1 C100.+ C101.1 C103.1 C104.+ C105.1 C107.1 D23.C D25.C D27.C D29.C D31.C D33.C D35.C D37.C D39.C D41.C F10.2 F11.2 F12.2 IC11.1 IC16.5 IC16.10 IC16.19 IC16.24 IC21.5 IC21.10 IC21.19 IC21.24 IC22.5 IC22.10 IC22.19 IC22.24 IC23.5 IC23.10 IC23.19 IC23.24 IC24.5 IC24.10 IC24.19 IC24.24 JP7.2 SJ4.2 SJ5.2 SJ6.2
AGND: C44.2 C46.2 C47.2 C48.2 C49.2 C50.2 C51.2 IC12.3 IC13.3 R5.2 R8.2 R10.2 R31.2 R35.1 R37.2 U3.5 ZD1.A ZD2.A ZD3.A ZD4.A ZD5.A
AGND1: C80.2 C81.2 C82.2 C83.2 C84.2 C85.2 C108.2 IC19.3 IC20.3 R66.1 R71.2 R72.2 R73.2 R74.2 R75.2 U4.5 ZD6.A ZD7.A ZD8.A ZD9.A ZD10.A
D1+: C32.1 IC10.12 R29.1
D1+1: C73.1 IC17.12 R63.1
D1-: C33.1 IC10.11 R28.1
D1-1: C74.1 IC17.11 R62.1
GND: C1.- C2.- C3.2 C4.- C5.2 C7.2 C8.2 C9.2 C10.- C11.2 C13.2 C14.- C15.2 C17.2 C18.- C19.2 C21.2 C22.2 C23.2 C24.2 C25.2 C26.2 C27.2 C28.2 C29.2 C30.2 C31.2 C32.2 C33.2 C34.2 C35.2 C36.2 C37.2 C38.2 C39.- C40.2 C42.2 C52.2 C53.- C54.- C55.- D1.A D3.A D5.A D7.A D9.A D11.A D13.A D15.A D17.A D19.A D21.A IC1.3 IC1.5 IC1.6 IC2.8 IC2.13 IC3.8 IC3.13 IC4.5 IC4.13 IC5.6 IC5.16 IC5.17 IC5.26 IC5.27 IC6.6 IC6.16 IC6.17 IC6.26 IC6.27 IC7.6 IC7.16 IC7.17 IC7.26 IC7.27 IC8.6 IC8.16 IC8.17 IC8.26 IC8.27 IC9.6 IC9.16 IC9.17 IC9.26 IC9.27 IC10.6 IC10.7 IC10.8 IC10.27 IC10.28 IC10.31 ISP1.6 ISP2.6 ISP3.6 ISP4.6 ISP5.6 JP1.1 JP11.1 JP13.1 JP17.1 Q1.2 Q2.2 Q3.2 R14.2 R15.2 R22.2 R23.2 R24.2 R25.2 R27.1 R30.1 R34.2 R35.2 SW1.A U2.2 U3.3 U3.21 U$6.A U$7.A U$8.A Y1.2 Y2.2
GND1: C45.- C56.- C57.2 C58.- C59.2 C61.2 C62.2 C63.2 C64.2 C65.2 C66.2 C67.2 C68.2 C69.2 C70.2 C71.2 C72.2 C73.2 C74.2 C75.2 C76.2 C77.2 C78.2 C79.2 C86.2 C87.- C88.- C89.- C90.2 C92.- C93.2 C95.2 C96.- C97.2 C99.2 C100.- C101.2 C103.2 C104.- C105.2 C107.2 D22.A D24.A D26.A D28.A D30.A D32.A D34.A D36.A D38.A D40.A D42.A IC11.3 IC11.5 IC11.6 IC14.8 IC14.13 IC15.8 IC15.13 IC16.6 IC16.16 IC16.17 IC16.26 IC16.27 IC17.6 IC17.7 IC17.8 IC17.27 IC17.28 IC17.31 IC18.5 IC18.13 IC21.6 IC21.16 IC21.17 IC21.26 IC21.27 IC22.6 IC22.16 IC22.17 IC22.26 IC22.27 IC23.6 IC23.16 IC23.17 IC23.26 IC23.27 IC24.6 IC24.16 IC24.17 IC24.26 IC24.27 ISP6.6 ISP7.6 ISP8.6 ISP9.6 ISP10.6 JP7.1 JP25.1 JP26.1 JP27.1 Q4.2 Q5.2 Q6.2 R54.2 R55.2 R56.2 R58.2 R59.2 R60.2 R61.1 R64.1 R65.2 R66.2 SW2.A U1.2 U4.3 U4.21 U$12.A U$13.A U$14.A Y3.2 Y4.2
ISP-MISO: ISP1.1 R4.2 U3.16
ISP-MISO1: ISP6.1 R44.2 U4.16
ISP-MOSI: ISP1.4 R3.2 U3.15
ISP-MOSI1: ISP6.4 R43.2 U4.15
ISP-SCK: ISP1.3 R2.2 U3.17
ISP-SCK1: ISP6.3 R42.2 U4.17
LATCH: IC2.12 IC3.12 U3.14
LATCH1: IC14.12 IC15.12 U4.14
MISO: ISP2.1 ISP3.1 ISP4.1 ISP5.1 R4.1
MISO1: ISP7.1 ISP8.1 ISP9.1 ISP10.1 R44.1
MOSI: IC2.14 ISP2.4 ISP3.4 ISP4.4 ISP5.4 R3.1
MOSI1: IC14.14 ISP7.4 ISP8.4 ISP9.4 ISP10.4 R43.1
N$1: D1.C IC1.2 L18.1
N$2: U3.8 Y1.3
N$3: C12.2 D8.A D9.C IC6.12 IC6.14 IC6.15 IC6.18 IC6.20 IC6.21 JP3.1
N$4: U3.7 Y1.1
N$5: C12.1 D6.A D7.C IC6.1 IC6.3 IC6.22 IC6.23 IC6.25 IC6.28 JP3.2
N$6: IC2.9 IC3.14
N$7: C9.1 IC10.2 R13.1 U$1.A
N$8: C16.2 D12.A D13.C IC7.12 IC7.14 IC7.15 IC7.18 IC7.20 IC7.21 JP4.1
N$9: C16.1 D10.A D11.C IC7.1 IC7.3 IC7.22 IC7.23 IC7.25 IC7.28 JP4.2
N$10: C20.2 D16.A D17.C IC8.12 IC8.14 IC8.15 IC8.18 IC8.20 IC8.21 JP5.1
N$11: C20.1 D14.A D15.C IC8.1 IC8.3 IC8.22 IC8.23 IC8.25 IC8.28 JP5.2
N$12: C41.2 D20.A D21.C IC9.12 IC9.14 IC9.15 IC9.18 IC9.20 IC9.21 JP6.1
N$13: C6.2 D4.A D5.C IC5.12 IC5.14 IC5.15 IC5.18 IC5.20 IC5.21 JP2.1
N$14: C41.1 D18.A D19.C IC9.1 IC9.3 IC9.22 IC9.23 IC9.25 IC9.28 JP6.2
N$15: IC3.7 R57.9
N$16: C43.2 IC4.2
N$17: IC3.6 R57.10
N$18: IC3.5 R57.11
N$19: C24.1 IC10.1 R11.1 R12.1 U$1.C
N$20: D22.C IC11.2 L7.1
N$21: JP17.2 R15.1 R21.1 U$2.A
N$22: IC10.30 Y2.3
N$23: IC10.29 Y2.1
N$24: JP17.3 R14.1 R20.1 U$2.C
N$25: JP13.3 R19.1 R22.1 U$3.C
N$26: C30.1 IC10.16 R16.2
N$27: C29.1 IC10.15 R17.2
N$28: C28.1 IC10.20 R18.2
N$29: C27.1 IC10.19 R19.2
N$30: C25.1 IC10.23 R20.2
N$31: C26.1 IC10.24 R21.2
N$32: JP13.2 R18.1 R23.1 U$3.A
N$33: JP11.3 R17.1 R24.1 U$4.C
N$34: JP11.2 R16.1 R25.1 U$4.A
N$35: F1.2 JP17.4
N$36: F2.2 JP13.4
N$37: F3.2 JP11.4
N$38: C23.1 IC4.3 IC4.10 IC4.11
N$39: IC4.9 R27.2 R28.2
N$40: IC4.8 R29.2 R30.2
N$41: F3.1 L2.P$2
N$42: F2.1 L3.P$2
N$43: JP14.1 Q1.3
N$44: JP8.1 R12.2
N$45: JP8.2 R13.2
N$46: LED3.C R34.1
N$47: JP15.1 Q2.3
N$48: JP16.1 Q3.3
N$49: F1.1 L4.P$2
N$50: C55.+ F6.1 JP16.2 SJ3.1 U$8.C
N$51: ISP2.5 R32.1
N$52: ISP3.5 R33.1
N$53: ISP4.5 R38.1
N$54: C54.+ F5.1 JP15.2 SJ2.1 U$7.C
N$55: C53.+ F7.1 JP14.2 SJ1.1 U$6.C
N$56: IC3.4 R57.12
N$57: IC14.9 IC15.14
N$58: ISP5.5 R39.1
N$59: C6.1 D2.A D3.C IC5.1 IC5.3 IC5.22 IC5.23 IC5.25 IC5.28 JP2.2
N$60: IC3.3 R57.13
N$61: IC3.2 R57.15
N$62: IC3.1 R57.16
N$63: IC3.15 R57.14
N$64: IC2.7 R41.9
N$65: IC2.6 R41.10
N$66: IC2.5 R41.11
N$67: IC2.4 R41.12
N$68: IC2.3 R41.13
N$69: IC2.2 R41.14
N$70: IC2.1 R41.16
N$71: IC2.15 R41.15
N$72: C60.2 D25.A D26.C IC16.12 IC16.14 IC16.15 IC16.18 IC16.20 IC16.21 JP9.1
N$73: C64.1 IC17.2 R47.1 U$5.A
N$74: C65.1 IC17.1 R45.1 R46.1 U$5.C
N$75: IC17.30 Y4.3
N$76: IC5.9 R6.2
N$77: IC7.9 R7.2
N$78: IC6.9 R9.2
N$79: IC9.9 R36.2
N$80: IC8.9 R26.2
N$81: IC17.29 Y4.1
N$82: C71.1 IC17.16 R48.2
N$83: C70.1 IC17.15 R49.2
N$84: C69.1 IC17.20 R50.2
N$85: C68.1 IC17.19 R51.2
N$86: C66.1 IC17.23 R52.2
N$87: C67.1 IC17.24 R53.2
N$88: JP27.2 R53.1 R55.1 U$9.A
N$89: JP27.3 R52.1 R54.1 U$9.C
N$90: JP26.3 R51.1 R56.1 U$10.C
N$91: JP26.2 R50.1 R58.1 U$10.A
N$92: JP25.3 R49.1 R59.1 U$11.C
N$93: JP25.2 R48.1 R60.1 U$11.A
N$94: F4.2 JP27.4
N$95: F8.2 JP26.4
N$96: F9.2 JP25.4
N$97: JP28.1 R46.2
N$98: JP28.2 R47.2
N$99: U4.8 Y3.3
N$100: U4.7 Y3.1
N$101: C90.1 IC18.3 IC18.10 IC18.11
N$102: IC18.9 R61.2 R62.2
N$103: IC18.8 R63.2 R64.2
N$104: F9.1 L1.P$2
N$105: F8.1 L5.P$2
N$106: F4.1 L6.P$2
N$107: JP10.1 Q4.3
N$108: JP18.1 Q5.3
N$109: JP19.1 Q6.3
N$110: LED1.C R65.1
N$111: ISP7.5 R67.1
N$112: ISP8.5 R68.1
N$113: ISP9.5 R69.1
N$114: ISP10.5 R70.1
N$115: C89.+ F11.1 JP19.2 SJ6.1 U$14.C
N$116: C88.+ F10.1 JP18.2 SJ5.1 U$13.C
N$117: C87.+ F12.1 JP10.2 SJ4.1 U$12.C
N$118: C91.2 IC18.2
N$119: C60.1 D23.A D24.C IC16.1 IC16.3 IC16.22 IC16.23 IC16.25 IC16.28 JP9.2
N$120: C94.2 D29.A D30.C IC21.12 IC21.14 IC21.15 IC21.18 IC21.20 IC21.21 JP20.1
N$121: C94.1 D27.A D28.C IC21.1 IC21.3 IC21.22 IC21.23 IC21.25 IC21.28 JP20.2
N$122: C98.2 D33.A D34.C IC22.12 IC22.14 IC22.15 IC22.18 IC22.20 IC22.21 JP21.1
N$123: C98.1 D31.A D32.C IC22.1 IC22.3 IC22.22 IC22.23 IC22.25 IC22.28 JP21.2
N$124: C102.2 D37.A D38.C IC23.12 IC23.14 IC23.15 IC23.18 IC23.20 IC23.21 JP22.1
N$125: C102.1 D35.A D36.C IC23.1 IC23.3 IC23.22 IC23.23 IC23.25 IC23.28 JP22.2
N$126: C106.2 D41.A D42.C IC24.12 IC24.14 IC24.15 IC24.18 IC24.20 IC24.21 JP23.1
N$127: C106.1 D39.A D40.C IC24.1 IC24.3 IC24.22 IC24.23 IC24.25 IC24.28 JP23.2
N$128: IC15.7 R82.9
N$129: IC15.6 R82.10
N$130: IC15.5 R82.11
N$131: IC15.4 R82.12
N$132: IC15.3 R82.13
N$133: IC15.2 R82.15
N$134: IC15.1 R82.16
N$135: IC15.15 R82.14
N$136: IC14.7 R81.9
N$137: IC14.6 R81.10
N$138: IC14.5 R81.11
N$139: IC14.4 R81.12
N$140: IC14.3 R81.13
N$141: IC14.2 R81.14
N$142: IC14.1 R81.16
N$143: IC14.15 R81.15
N$144: IC16.9 R76.2
N$145: IC22.9 R77.2
N$146: IC21.9 R78.2
N$147: IC24.9 R79.2
N$148: IC23.9 R80.2
RXD: IC4.1 U3.30
RXD1: IC18.1 U4.30
SCK: IC2.11 IC3.11 ISP2.3 ISP3.3 ISP4.3 ISP5.3 R2.1
SCK1: IC14.11 IC15.11 ISP7.3 ISP8.3 ISP9.3 ISP10.3 R42.1
SW0: Q3.1 R57.2
SW1: Q2.1 R57.4
SW2: Q1.1 R57.5
SW3: JP12.1 R57.6
SW4: JP12.2 R57.7
SW5: JP12.3 R57.8
SW6: JP24.1 R82.6
SW7: Q4.1 R82.5
SW8: Q5.1 R82.4
SW9: Q6.1 R82.2
SW10: JP24.3 R82.8
SW11: JP24.2 R82.7
TEMP0: C50.1 IC12.2 U3.28
TEMP1: C51.1 IC13.2 U3.19
TEMP2: C84.1 IC19.2 U4.28
TEMP3: C85.1 IC20.2 U4.19
TXD: IC4.4 U3.31
TXD1: IC18.4 U4.31

## Tracks (layer width: path | path; a pad name or v marks a point on that pad's centre or on a via)
0HA  (via drill 0.5)
  Top 0.305: IC6.8 v92.08,29.21 | IC6.2 99.69,28.26 100.33,28.89 101.92,28.89 102.23,28.57 v102.23,27.94 | R41.2 v56.83,60.96
  Bottom 0.305: v92.08,29.21 93.34,27.94 v102.23,27.94 97.16,33.02 80.64,33.02 65.72,47.94 65.72,52.07 v56.83,60.96
0HA1  (via drill 0.5)
  Top 0.305: IC21.8 v92.08,106.68 | IC21.2 99.69,105.73 100.33,106.36 101.92,106.36 102.23,106.05 v102.23,105.41 | R81.2 v56.83,138.43
  Bottom 0.305: v92.08,106.68 93.34,105.41 v102.23,105.41 97.16,110.49 80.64,110.49 65.72,125.41 65.72,129.54 v56.83,138.43
0HB  (via drill 0.5)
  Top 0.305: IC6.13 v85.72,30.16 | v93.34,31.43 IC6.7 | R41.1 v55.56,60.96
  Bottom 0.305: v93.34,31.43 92.08,30.16 v85.72,30.16 83.5,32.38 80.33,32.38 65.09,47.62 65.09,51.44 v55.56,60.96
0HB1  (via drill 0.5)
  Top 0.305: IC21.13 v85.72,107.63 | v93.34,108.9 IC21.7 | R81.1 v55.56,138.43
  Bottom 0.305: v93.34,108.9 92.08,107.63 v85.72,107.63 83.5,109.86 80.33,109.86 65.09,125.09 65.09,128.91 v55.56,138.43
0SENSE  (via drill 0.5)
  Top 0.305: R9.1 87.48,31.43 | 87.48,31.43 R8.1 | 84.45,30.8 85.09,31.43 87.48,31.43 | 84.45,30.8 ZD2.C | U3.23 52.8,32.29 v53.98,31.11 | v83.5,31.11 84.14,31.11 84.45,30.8
  Bottom 0.305: v83.5,31.11 v53.98,31.11
0SENSE1  (via drill 0.5)
  Top 0.305: R78.1 87.48,108.9 | 87.48,108.9 R72.1 | 84.45,108.27 85.09,108.9 87.48,108.9 | 84.45,108.27 ZD7.C | U4.23 52.8,109.76 v53.98,108.58 | v83.5,108.58 84.14,108.58 84.45,108.27
  Bottom 0.305: v83.5,108.58 v53.98,108.58
0STAT  (via drill 0.5)
  Top 0.305: IC6.4 97.16,28.26 97.79,28.89 99.63,28.89 100.27,29.53 v102.36,29.53 | U3.32 57.09,45.98 v57.15,46.04 | v103.82,18.1 v103.82,26.67
  Bottom 0.305: v102.36,29.53 103.82,28.07 v103.82,26.67 | v103.82,18.1 103.82,13.02 102.87,12.06 53.34,12.06 53.02,12.38 53.02,33.66 53.34,33.97 55.24,33.97 58.1,36.83 58.1,45.09 v57.15,46.04
0STAT1  (via drill 0.5)
  Top 0.305: IC21.4 97.16,105.73 97.79,106.36 99.63,106.36 100.27,107 v102.36,107 | U4.32 57.09,123.45 v57.15,123.51 | v103.82,95.57 v103.82,104.14
  Bottom 0.305: v102.36,107 103.82,105.54 v103.82,104.14 | v103.82,95.57 103.82,90.49 102.87,89.53 53.34,89.53 53.02,89.85 53.02,111.12 53.34,111.44 55.24,111.44 58.1,114.3 58.1,122.56 v57.15,123.51
1HA  (via drill 0.5)
  Top 0.305: IC7.2 128.91,28.26 129.54,28.89 131.13,28.89 131.44,28.57 v131.44,27.94 | IC7.8 v121.28,29.21 | R41.3 v58.1,60.96
  Bottom 0.305: v131.44,27.94 122.56,27.94 v121.28,29.21 104.46,29.21 100.01,33.66 80.96,33.66 66.36,48.26 66.36,52.7 v58.1,60.96
1HA1  (via drill 0.5)
  Top 0.305: IC22.2 128.91,105.73 129.54,106.36 131.13,106.36 131.44,106.05 v131.44,105.41 | IC22.8 v121.28,106.68 | R81.3 v58.1,138.43
  Bottom 0.305: v131.44,105.41 122.56,105.41 v121.28,106.68 104.46,106.68 100.01,111.12 80.96,111.12 66.36,125.73 66.36,130.18 v58.1,138.43
1HB  (via drill 0.5)
  Top 0.305: IC7.13 v114.94,30.16 | v122.56,31.43 IC7.7 | R41.4 v59.37,60.96
  Bottom 0.305: v122.56,31.43 121.28,30.16 v114.94,30.16 104.46,30.16 100.33,34.29 81.28,34.29 66.99,48.58 66.99,53.34 v59.37,60.96
1HB1  (via drill 0.5)
  Top 0.305: IC22.13 v114.94,107.63 | v122.56,108.9 IC22.7 | R81.4 v59.37,138.43
  Bottom 0.305: v122.56,108.9 121.28,107.63 v114.94,107.63 104.46,107.63 100.33,111.76 81.28,111.76 66.99,126.05 66.99,130.81 v59.37,138.43
1SENSE  (via drill 0.5)
  Top 0.305: R7.1 116.69,31.43 | 116.69,31.43 R10.1 | 116.69,31.43 114.3,31.43 113.67,30.8 ZD3.C 113.3,29.48 111.44,27.62 111.44,10.79 v112.39,9.84 | U3.24 53.75,38.73 v54.61,38.73
  Bottom 0.305: v54.61,38.73 54.61,37.15 53.98,36.51 51.12,36.51 50.48,35.88 50.48,11.11 52.07,9.53 112.08,9.53 v112.39,9.84
1SENSE1  (via drill 0.5)
  Top 0.305: R77.1 116.69,108.9 | 116.69,108.9 R73.1 | 116.69,108.9 114.3,108.9 113.67,108.27 ZD8.C 113.3,106.95 111.44,105.09 111.44,88.27 v112.39,87.31 | U4.24 53.75,116.2 v54.61,116.2
  Bottom 0.305: v54.61,116.2 54.61,114.62 53.98,113.98 51.12,113.98 50.48,113.35 50.48,88.58 52.07,87 112.08,87 v112.39,87.31
1STAT  (via drill 0.5)
  Top 0.305: IC7.4 126.36,28.26 127,28.89 128.78,28.89 129.41,29.53 v131.7,29.53 | U3.1 54.45,47.47 v54.61,47.31 | v133.03,17.78 v133.03,26.35
  Bottom 0.305: v133.03,26.35 133.03,28.26 131.76,29.53 v131.7,29.53 | v133.03,17.78 133.03,11.75 132.08,10.79 114.62,10.79 113.35,12.06 111.44,12.06 110.81,11.43 53.02,11.43 52.39,12.06 52.39,34.29 52.7,34.61 54.93,34.61 57.47,37.15 57.47,44.45 v54.61,47.31
1STAT1  (via drill 0.5)
  Top 0.305: IC22.4 126.36,105.73 127,106.36 128.78,106.36 129.41,107 v131.7,107 | U4.1 54.45,124.94 v54.61,124.78 | v133.03,95.25 v133.03,103.82
  Bottom 0.305: v133.03,103.82 133.03,105.73 131.76,107 v131.7,107 | v133.03,95.25 133.03,89.22 132.08,88.27 114.62,88.27 113.35,89.53 111.44,89.53 110.81,88.9 53.02,88.9 52.39,89.53 52.39,111.76 52.7,112.08 54.93,112.08 57.47,114.62 57.47,121.92 v54.61,124.78
2HA  (via drill 0.5)
  Top 0.305: IC5.8 v150.5,29.21 | IC5.2 158.12,28.57 158.43,28.89 160.34,28.89 160.66,28.57 v160.66,27.94 | R41.5 v60.64,60.96 | v136.84,29.21 v140.65,29.21
  Bottom 0.305: v160.66,27.94 151.76,27.94 v150.5,29.21 v140.65,29.21 | v60.64,60.96 67.63,53.98 67.63,48.9 81.6,34.92 127.95,34.92 133.67,29.21 v136.84,29.21
2HA1  (via drill 0.5)
  Top 0.305: IC16.8 v150.5,106.68 | IC16.2 158.12,106.05 158.43,106.36 160.34,106.36 160.66,106.05 v160.66,105.41 | R81.5 v60.64,138.43 | v136.84,106.68 v140.65,106.68
  Bottom 0.305: v160.66,105.41 151.76,105.41 v150.5,106.68 v140.65,106.68 | v60.64,138.43 67.63,131.44 67.63,126.36 81.6,112.39 127.95,112.39 133.67,106.68 v136.84,106.68
2HB  (via drill 0.5)
  Top 0.305: IC5.13 v144.15,30.16 | IC5.7 v151.76,31.43 | R41.6 v61.91,60.96 | v136.84,30.48 v140.65,30.48
  Bottom 0.305: v151.76,31.43 150.5,30.16 v144.15,30.16 143.83,30.48 v140.65,30.48 | v61.91,60.96 68.26,54.61 68.26,49.21 81.92,35.56 128.27,35.56 133.35,30.48 v136.84,30.48
2HB1  (via drill 0.5)
  Top 0.305: IC16.13 v144.15,107.63 | IC16.7 v151.76,108.9 | R81.6 v61.91,138.43 | v136.84,107.95 v140.65,107.95
  Bottom 0.305: v151.76,108.9 150.5,107.63 v144.15,107.63 143.83,107.95 v140.65,107.95 | v61.91,138.43 68.26,132.08 68.26,126.68 81.92,113.03 128.27,113.03 133.35,107.95 v136.84,107.95
2SENSE  (via drill 0.5)
  Top 0.305: R6.1 145.9,31.43 | 145.9,31.43 145.9,32.55 146.05,32.7 R5.1 | ZD1.C 142.88,29.53 | 145.9,31.43 143.51,31.43 142.88,30.8 142.88,29.53 | 142.88,29.53 142.24,29.53 141.6,28.89 141.6,28.26 v141.6,18.1 | U3.25 56.46,40.38 v56.52,40.32
  Bottom 0.305: v141.6,18.1 141.6,10.79 140.97,10.16 114.3,10.16 113.03,11.43 111.76,11.43 111.12,10.79 52.7,10.79 51.75,11.75 51.75,34.92 52.07,35.24 54.61,35.24 56.52,37.15 v56.52,40.32
2SENSE1  (via drill 0.5)
  Top 0.305: R76.1 145.9,108.9 | 145.9,108.9 145.9,110.02 146.05,110.17 R71.1 | ZD6.C 142.88,107 | 145.9,108.9 143.51,108.9 142.88,108.27 142.88,107 | 142.88,107 142.24,107 141.6,106.36 v141.6,95.57 | U4.25 56.46,117.85 v56.52,117.79
  Bottom 0.305: v141.6,95.57 141.6,88.27 140.97,87.63 114.3,87.63 113.03,88.9 111.76,88.9 111.12,88.27 52.7,88.27 51.75,89.22 51.75,112.39 52.07,112.71 54.61,112.71 56.52,114.62 v56.52,117.79
2STAT  (via drill 0.5)
  Top 0.305: IC5.4 155.57,28.26 156.21,28.89 157.73,28.89 158.37,29.53 v160.78,29.53 | v53.66,46.04 52.8,46.9 U3.2 | v161.61,19.05 v161.61,26.35
  Bottom 0.305: v160.78,29.53 161.61,28.7 v161.61,26.35 | v53.66,46.04 55.56,44.13 55.56,37.15 54.29,35.88 51.44,35.88 51.12,35.56 51.12,11.43 52.39,10.16 111.44,10.16 112.08,10.79 112.71,10.79 113.98,9.53 160.97,9.53 162.24,10.79 162.24,18.41 v161.61,19.05
2STAT1  (via drill 0.5)
  Top 0.305: IC16.4 155.57,105.73 156.21,106.36 157.73,106.36 158.37,107 v160.78,107 | v53.66,123.51 52.8,124.36 U4.2 | v161.61,96.52 v161.61,103.82
  Bottom 0.305: v160.78,107 161.61,106.17 v161.61,103.82 | v53.66,123.51 55.56,121.6 55.56,114.62 54.29,113.35 51.44,113.35 51.12,113.03 51.12,88.9 52.39,87.63 111.44,87.63 112.08,88.27 112.71,88.27 113.98,87 160.97,87 162.24,88.27 162.24,95.89 v161.61,96.52
3.3V  (via drill 0.5)
  Top 0.305: IC10.26 IC10.25 | IC10.3 IC10.4 29.46,37.22 v29.53,37.15 | IC10.25 32.89,33.23 C36.1 C35.1 31.75,28.07 31.75,25.4 32.06,25.09 U2.5 | IC10.25 29.84,33.81 | 29.84,33.81 27.94,33.81 | 27.94,33.81 27.79,33.81 27.3,34.29 27.3,34.92 | 27.3,34.92 27.3,36.83 | IC10.14 27.19,34.81 27.3,34.92 | IC10.18 27.96,33.79 27.94,33.81 | IC10.22 29.96,33.7 29.84,33.81 | 27.3,36.83 v27.62,37.15 | IC10.10 27.29,36.81 27.3,36.83 | R11.2 v35.88,45.72
  Bottom 0.305: v27.62,37.15 v29.53,37.15 35.88,43.5 v35.88,45.72
3.3V1  (via drill 0.5)
  Top 0.305: IC17.26 IC17.25 | IC17.3 IC17.4 29.46,114.69 v29.53,114.62 | IC17.25 32.89,110.7 C77.1 C76.1 31.75,105.54 31.75,102.87 32.06,102.56 U1.5 | IC17.25 29.84,111.28 | 29.84,111.28 27.94,111.28 | 27.94,111.28 27.79,111.28 27.3,111.76 27.3,112.39 | 27.3,112.39 27.3,114.3 | IC17.14 27.19,112.28 27.3,112.39 | IC17.18 27.96,111.26 27.94,111.28 | IC17.22 29.96,111.17 29.84,111.28 | 27.3,114.3 v27.62,114.62 | IC17.10 27.29,114.28 27.3,114.3 | R45.2 v35.88,123.19
  Bottom 0.305: v27.62,114.62 v29.53,114.62 35.88,120.97 v35.88,123.19
3HA  (via drill 0.5)
  Top 0.305: v160.66,45.72 IC9.8 | IC9.2 153.03,46.67 152.4,46.04 150.81,46.04 150.5,46.35 v150.5,47.31 | R41.7 v63.18,60.96 | v117.47,65.41 v120.02,65.41
  Bottom 0.305: v160.66,45.72 159.07,47.31 v150.5,47.31 133.03,64.77 120.65,64.77 v120.02,65.41 | v63.18,60.96 66.99,64.77 116.84,64.77 v117.47,65.41
3HA1  (via drill 0.5)
  Top 0.305: v160.66,123.19 IC24.8 | IC24.2 153.03,124.14 152.4,123.51 150.81,123.51 150.5,123.83 v150.5,124.78 | R81.7 v63.18,138.43 | v117.47,142.88 v120.02,142.88
  Bottom 0.305: v160.66,123.19 159.07,124.78 v150.5,124.78 133.03,142.24 120.65,142.24 v120.02,142.88 | v63.18,138.43 66.99,142.24 116.84,142.24 v117.47,142.88
3HB  (via drill 0.5)
  Top 0.305: IC9.13 v167,44.77 | IC9.7 v159.38,43.5 | R41.8 v64.45,60.96 | v117.47,64.14 v120.02,64.14
  Bottom 0.305: v167,44.77 165.74,43.5 v159.38,43.5 156.66,46.23 150.3,46.23 132.4,64.14 v120.02,64.14 | v64.45,60.96 67.63,64.14 v117.47,64.14
3HB1  (via drill 0.5)
  Top 0.305: IC24.13 v167,122.24 | IC24.7 v159.38,120.97 | R81.8 v64.45,138.43 | v117.47,141.6 v120.02,141.6
  Bottom 0.305: v167,122.24 165.74,120.97 v159.38,120.97 156.66,123.7 150.3,123.7 132.4,141.6 v120.02,141.6 | v64.45,138.43 67.63,141.6 v117.47,141.6
3SENSE  (via drill 0.5)
  Top 0.305: R36.1 165.25,43.5 | 165.25,43.5 R37.1 | 165.25,43.5 167.64,43.5 168.28,44.13 ZD5.C 169.5,45.45 v169.54,45.4 | U3.26 56.93,41.18 57.47,40.64 67.63,40.64 72.07,45.09 72.07,50.16 v71.75,50.48
  Bottom 0.305: v71.75,50.48 72.07,50.16 72.07,49.21 83.19,38.1 114.94,38.1 119.7,42.86 119.7,46.04 120.4,46.74 121.86,46.74 126.68,41.91 136.21,41.91 140.65,46.35 149.22,46.35 153.35,42.23 166.37,42.23 v169.54,45.4
3SENSE1  (via drill 0.5)
  Top 0.305: R79.1 165.25,120.97 | 165.25,120.97 R75.1 | 165.25,120.97 167.64,120.97 168.28,121.6 ZD10.C 169.5,122.92 v169.54,122.87 | U4.26 56.93,118.65 57.47,118.11 67.63,118.11 72.07,122.56 72.07,127.64 v71.75,127.95
  Bottom 0.305: v71.75,127.95 72.07,127.64 72.07,126.68 83.19,115.57 114.94,115.57 119.7,120.33 119.7,123.51 120.4,124.21 121.86,124.21 126.68,119.38 136.21,119.38 140.65,123.83 149.22,123.83 153.35,119.7 166.37,119.7 v169.54,122.87
3STAT  (via drill 0.5)
  Top 0.305: IC9.4 155.57,46.67 154.94,46.04 153.1,46.04 152.53,45.47 v148.91,45.47 | U3.9 42.92,45.98 41.59,47.31 41.59,54.61 43.18,56.2 67.94,56.2 v68.58,55.56
  Bottom 0.305: v68.58,55.56 68.9,55.24 68.9,49.53 82.23,36.2 132.4,36.2 138.11,41.91 145.41,41.91 v148.91,45.47
3STAT1  (via drill 0.5)
  Top 0.305: IC24.4 155.57,124.14 154.94,123.51 153.1,123.51 152.53,122.94 v148.91,122.94 | U4.9 42.92,123.45 41.59,124.78 41.59,132.08 43.18,133.67 67.94,133.67 v68.58,133.03
  Bottom 0.305: v68.58,133.03 68.9,132.72 68.9,127 82.23,113.67 132.4,113.67 138.11,119.38 145.41,119.38 v148.91,122.94
4HA  (via drill 0.5)
  Top 0.305: IC8.8 v131.44,45.72 | IC8.2 123.83,46.67 123.19,46.04 121.6,46.04 121.28,46.35 v121.28,47.62 121.28,58.1 117.79,61.59 v117.47,61.59 | R57.3 v71.44,60.96
  Top 0.406: IC8.2 123.83,47.62
  Bottom 0.305: v117.47,61.59 117.16,61.59 115.89,62.87 73.34,62.87 v71.44,60.96 | v121.28,47.62 129.54,47.62 v131.44,45.72
4HA1  (via drill 0.5)
  Top 0.305: IC23.8 v131.44,123.19 | IC23.2 123.83,124.14 123.19,123.51 121.6,123.51 121.28,123.83 v121.28,125.09 121.28,135.57 117.79,139.06 v117.47,139.06 | R82.3 v71.44,138.43
  Top 0.406: IC23.2 123.83,125.09
  Bottom 0.305: v117.47,139.06 117.16,139.06 115.89,140.34 73.34,140.34 v71.44,138.43 | v121.28,125.09 129.54,125.09 v131.44,123.19
4HB  (via drill 0.5)
  Top 0.305: IC8.13 v137.79,44.77 | R57.1 v68.9,60.96 | IC8.7 v130.18,43.5 | v117.47,62.87 v120.02,62.87
  Bottom 0.305: v130.18,43.5 136.53,43.5 v137.79,44.77 140.02,46.99 140.02,54.93 131.44,63.5 120.65,63.5 v120.02,62.87 | v117.47,62.87 116.84,63.5 71.44,63.5 v68.9,60.96
4HB1  (via drill 0.5)
  Top 0.305: IC23.13 v137.79,122.24 | R82.1 v68.9,138.43 | IC23.7 v130.18,120.97 | v117.47,140.34 v120.02,140.34
  Bottom 0.305: v130.18,120.97 136.53,120.97 v137.79,122.24 140.02,124.46 140.02,132.4 131.44,140.97 120.65,140.97 v120.02,140.34 | v117.47,140.34 116.84,140.97 71.44,140.97 v68.9,138.43
4SENSE  (via drill 0.5)
  Top 0.305: R26.1 136.04,43.5 | 136.04,43.5 R31.1 | 136.04,43.5 138.43,43.5 139.06,44.13 ZD4.C 139.97,45.45 140.34,45.09 v140.34,44.13 | U3.27 57.08,41.98 57.78,41.27 67.31,41.27 71.44,45.4 71.44,49.21 v71.12,49.53
  Bottom 0.305: v71.12,49.53 71.44,49.21 71.44,48.9 82.87,37.47 115.25,37.47 120.33,42.55 120.33,45.66 120.9,46.23 121.6,46.23 126.56,41.27 136.53,41.27 139.38,44.13 v140.34,44.13
4SENSE1  (via drill 0.5)
  Top 0.305: R80.1 136.04,120.97 | 136.04,120.97 R74.1 | 136.04,120.97 138.43,120.97 139.06,121.6 ZD9.C 139.97,122.92 140.34,122.56 v140.34,121.6 | U4.27 57.08,119.45 57.78,118.75 67.31,118.75 71.44,122.87 71.44,126.68 v71.12,127
  Bottom 0.305: v71.12,127 71.44,126.68 71.44,126.36 82.87,114.94 115.25,114.94 120.33,120.02 120.33,123.13 120.9,123.7 121.6,123.7 126.56,118.75 136.53,118.75 139.38,121.6 v140.34,121.6
4STAT  (via drill 0.5)
  Top 0.305: IC8.4 126.36,46.67 125.73,46.04 123.89,46.04 123.25,45.4 v121.16,45.4 | U3.10 42.77,45.18 40.96,46.99 40.96,54.93 42.86,56.83 68.9,56.83 v69.53,56.2
  Bottom 0.305: v69.53,56.2 69.53,49.85 82.55,36.83 115.57,36.83 121.16,42.42 v121.16,45.4
4STAT1  (via drill 0.5)
  Top 0.305: IC23.4 126.36,124.14 125.73,123.51 123.89,123.51 123.25,122.87 v121.16,122.87 | U4.10 42.77,122.65 40.96,124.46 40.96,132.4 42.86,134.3 68.9,134.3 v69.53,133.67
  Bottom 0.305: v69.53,133.67 69.53,127.32 82.55,114.3 115.57,114.3 121.16,119.89 v121.16,122.87
!EN1  (via drill 0.5)
  Top 0.305: U3.22 52,40.08 50.8,41.27 v50.8,44.26 | 46.99,58.26 R39.2 v48.58,58.42
  Bottom 0.305: v50.8,44.26 47.62,47.43 47.62,50.16 48.58,51.12 v48.58,58.42
!EN2
  Top 0.305: U3.11 42.62,44.38 40.16,46.84 R38.2
!EN3
  Top 0.305: R33.2 33.81,56.36 39.37,50.8 39.37,46.67 42.46,43.58 U3.12
!EN4
  Top 0.305: R32.2 21.11,57.63 21.91,56.83 25.08,56.83 29.53,52.39 36.51,52.39 38.42,50.48 38.42,46.67 42.31,42.78 U3.13
!EN5
  Top 0.305: R67.2 21.11,135.1 21.91,134.3 25.08,134.3 29.53,129.86 36.51,129.86 38.42,127.95 38.42,124.14 42.31,120.25 U4.13
!EN6
  Top 0.305: R68.2 33.81,133.83 39.37,128.27 39.37,124.14 42.46,121.05 U4.12
!EN7  (via drill 0.5)
  Top 0.305: U4.22 52,117.55 50.8,118.75 v50.8,121.73 | 46.99,135.72 R70.2 v48.58,135.89
  Bottom 0.305: v50.8,121.73 47.62,124.9 47.62,127.64 48.58,128.59 v48.58,135.89
!EN8
  Top 0.305: U4.11 42.62,121.85 40.16,124.31 R69.2
!RST  (via drill 0.5)
  Top 0.305: R1.1 57.62,49.38 60.33,46.67 SW1.B 60.09,43.58 U3.29 53.74,43.58 v53.66,43.5 | v27.3,7.3 C43.1
  Bottom 0.305: v27.3,7.3 27.3,12.06 33.02,17.78 38.42,17.78 39.37,18.73 39.37,36.83 ISP1.5 41.91,36.83 41.91,34.92 42.55,34.29 46.35,34.29 47.62,35.56 47.62,42.23 48.9,43.5 v53.66,43.5
!RST1  (via drill 0.5)
  Top 0.305: R40.1 57.62,126.85 60.33,124.14 SW2.B 60.09,121.05 U4.29 53.74,121.05 v53.66,120.97 | v27.3,84.77 C91.1
  Bottom 0.305: v27.3,84.77 27.3,89.53 33.02,95.25 38.42,95.25 39.37,96.2 39.37,114.3 ISP6.5 41.91,114.3 41.91,112.39 42.55,111.76 46.35,111.76 47.62,113.03 47.62,119.7 48.9,120.97 v53.66,120.97
+5V  (via drill 0.5, 0.6, 0.7)
  Top 0.305: U2.3 36.52,26.98 36.83,26.67 | 36.83,26.67 36.83,25.4 36.52,25.09 U2.1 35.59,22.96 C22.1 34.92,22.86 34.29,22.23 34.29,16.83 34.61,16.51 IC4.12 34.61,14.29 34.42,14.1 C34.1 C52.1 | C48.1 C49.1 174.44,21.61 IC13.1 174.31,21.91 175.58,23.18 175.58,27.3 174.31,28.57 v174.31,40.01 174.31,46.23 C46.1 | C46.1 C47.1 174.44,50.82 IC12.1 | L3.P$1 v23.81,28.57 | L2.P$1 v23.81,44.45 | 63.82,70.61 56.52,70.61 56.2,70.93 IC2.16 | 63.82,70.61 C8.1 69.53,70.61 | IC2.10 63.82,70.61 | 69.53,70.61 76.65,70.61 | 76.65,70.61 77.15,71.12 IC3.10 | IC3.16 69.53,70.61 | LED3.A 87.31,41.27 88.58,40.01 90.81,40.01 | 90.81,40.01 C2.+ | U3.6 49.6,45.33 49.85,45.09 | 49.85,45.09 50.8,45.09 51.2,45.48 U3.4 51.2,49.42 C3.1 C31.1 51.3,52.58 51.56,52.84 C44.1 56.83,54.61 | 49.85,45.09 49.85,40.64 | 49.85,40.64 50.4,40.09 U3.20 | 49.85,40.64 49.21,40.64 48.8,40.23 U3.18 48.8,37.37 46.99,35.56 ISP1.2 36.83,26.67 | 56.83,52.39 R1.2 56.83,54.61 | 76.65,70.61 C7.1 C37.1 83.37,70.61 84.77,69.22 84.77,65.72 v81.15,62.1 | v89.22,41.59 90.81,40.01 | 56.83,54.61 v70.48,54.61 | v117.47,41.91 119.38,40.01 v145.1,40.01 | v147,40.01 v170.81,40.01 | 174.44,46.23 174.31,46.35 C46.1
  Top 0.61: L4.P$1 v23.81,12.7
  Top 1.016: 88.9,44.13 L18.2 92.1,50.37 IC1.4 | 88.9,44.13 90.93,42.1 C2.+ | 25.72,71.44 17.46,71.44 ISP2.2 | 25.72,71.44 35.56,71.44 | 35.56,71.44 45.4,71.44 | ISP3.2 25.72,71.44 | ISP4.2 35.56,71.44 | ISP5.2 45.4,71.44 | 45.4,71.44 49.21,71.44 54.29,66.36 v54.29,58.74 | v69.85,40.96 69.85,39.69 72.39,37.15 76.52,37.15 82.55,43.18 87.95,43.18 88.9,44.13
  Bottom 0.305: v81.15,62.1 77.15,58.1 77.15,54.61 | 77.15,54.61 77.15,47.31 82.87,41.59 v89.22,41.59 89.22,39.69 90.17,38.73 114.3,38.73 v117.47,41.91 | v70.48,54.61 77.15,54.61 | v145.1,40.01 v147,40.01 | v170.81,40.01 v174.31,40.01
  Bottom 0.61: v23.81,12.7 v23.81,28.57 21.59,30.8 21.59,42.23 v23.81,44.45 23.81,47.31 11.43,59.69 11.43,70.17 12.7,71.44 14.29,71.44 ISP2.2
  Bottom 1.016: v54.29,58.74 54.29,56.52 v69.85,40.96
+5V1  (via drill 0.5, 0.6, 0.7)
  Top 0.305: U1.3 36.52,104.45 36.83,104.14 | 36.83,104.14 36.83,102.87 36.52,102.56 U1.1 35.59,100.43 C63.1 34.92,100.33 34.29,99.69 34.29,94.3 34.61,93.98 IC18.12 34.61,91.76 34.42,91.57 C75.1 C86.1 | C82.1 C83.1 174.44,99.08 IC20.1 174.31,99.38 175.58,100.65 175.58,104.78 174.31,106.05 v174.31,117.47 174.31,123.69 C80.1 | C80.1 C81.1 174.44,128.29 IC19.1 | L5.P$1 v23.81,106.05 | L1.P$1 v23.81,121.92 | 63.82,148.09 56.52,148.09 56.2,148.4 IC14.16 | 63.82,148.09 C62.1 69.53,148.09 | IC14.10 63.82,148.09 | 69.53,148.09 76.65,148.09 | 76.65,148.09 77.15,148.59 IC15.10 | IC15.16 69.53,148.09 | LED1.A 87.31,118.75 88.58,117.47 90.81,117.47 | 90.81,117.47 C56.+ | U4.6 49.6,122.8 49.85,122.56 | 49.85,122.56 50.8,122.56 51.2,122.95 U4.4 51.2,126.89 C57.1 C72.1 51.3,130.04 51.56,130.31 C108.1 56.83,132.08 | 49.85,122.56 49.85,118.11 | 49.85,118.11 50.4,117.56 U4.20 | 49.85,118.11 49.21,118.11 48.8,117.7 U4.18 48.8,114.84 46.99,113.03 ISP6.2 36.83,104.14 | 56.83,129.86 R40.2 56.83,132.08 | 76.65,148.09 C61.1 C78.1 83.37,148.09 84.77,146.69 84.77,143.19 v81.15,139.57 | v89.22,119.06 90.81,117.47 | 56.83,132.08 v70.48,132.08 | v117.47,119.38 119.38,117.47 v145.1,117.47 | v147,117.47 v170.81,117.47 | 174.44,123.69 174.31,123.83 C80.1
  Top 0.61: L6.P$1 v23.81,90.17
  Top 1.016: 88.9,121.6 L7.2 92.1,127.84 IC11.4 | 88.9,121.6 90.93,119.57 C56.+ | 25.72,148.91 17.46,148.91 ISP7.2 | 25.72,148.91 35.56,148.91 | 35.56,148.91 45.4,148.91 | ISP8.2 25.72,148.91 | ISP9.2 35.56,148.91 | ISP10.2 45.4,148.91 | 45.4,148.91 49.21,148.91 54.29,143.83 v54.29,136.21 | v69.85,118.43 69.85,117.16 72.39,114.62 76.52,114.62 82.55,120.65 87.95,120.65 88.9,121.6